# Altium PCB MCH_MAIN.PCBDOC (part 1 of 5)
Units mil, origin at the board's own origin, x right, y up, seen from the top; angles counter-clockwise.
Board outline 7194.88 x 2984.25 mil, 8 copper layers (Top Layer, MidLayer1, MidLayer2, GND, Power, MidLayer3, MidLayer4, Bottom Layer); 584 components, 952 nets, 3896 pads, 365 vias.
Unrouted connection lines stored in the file: 2112.
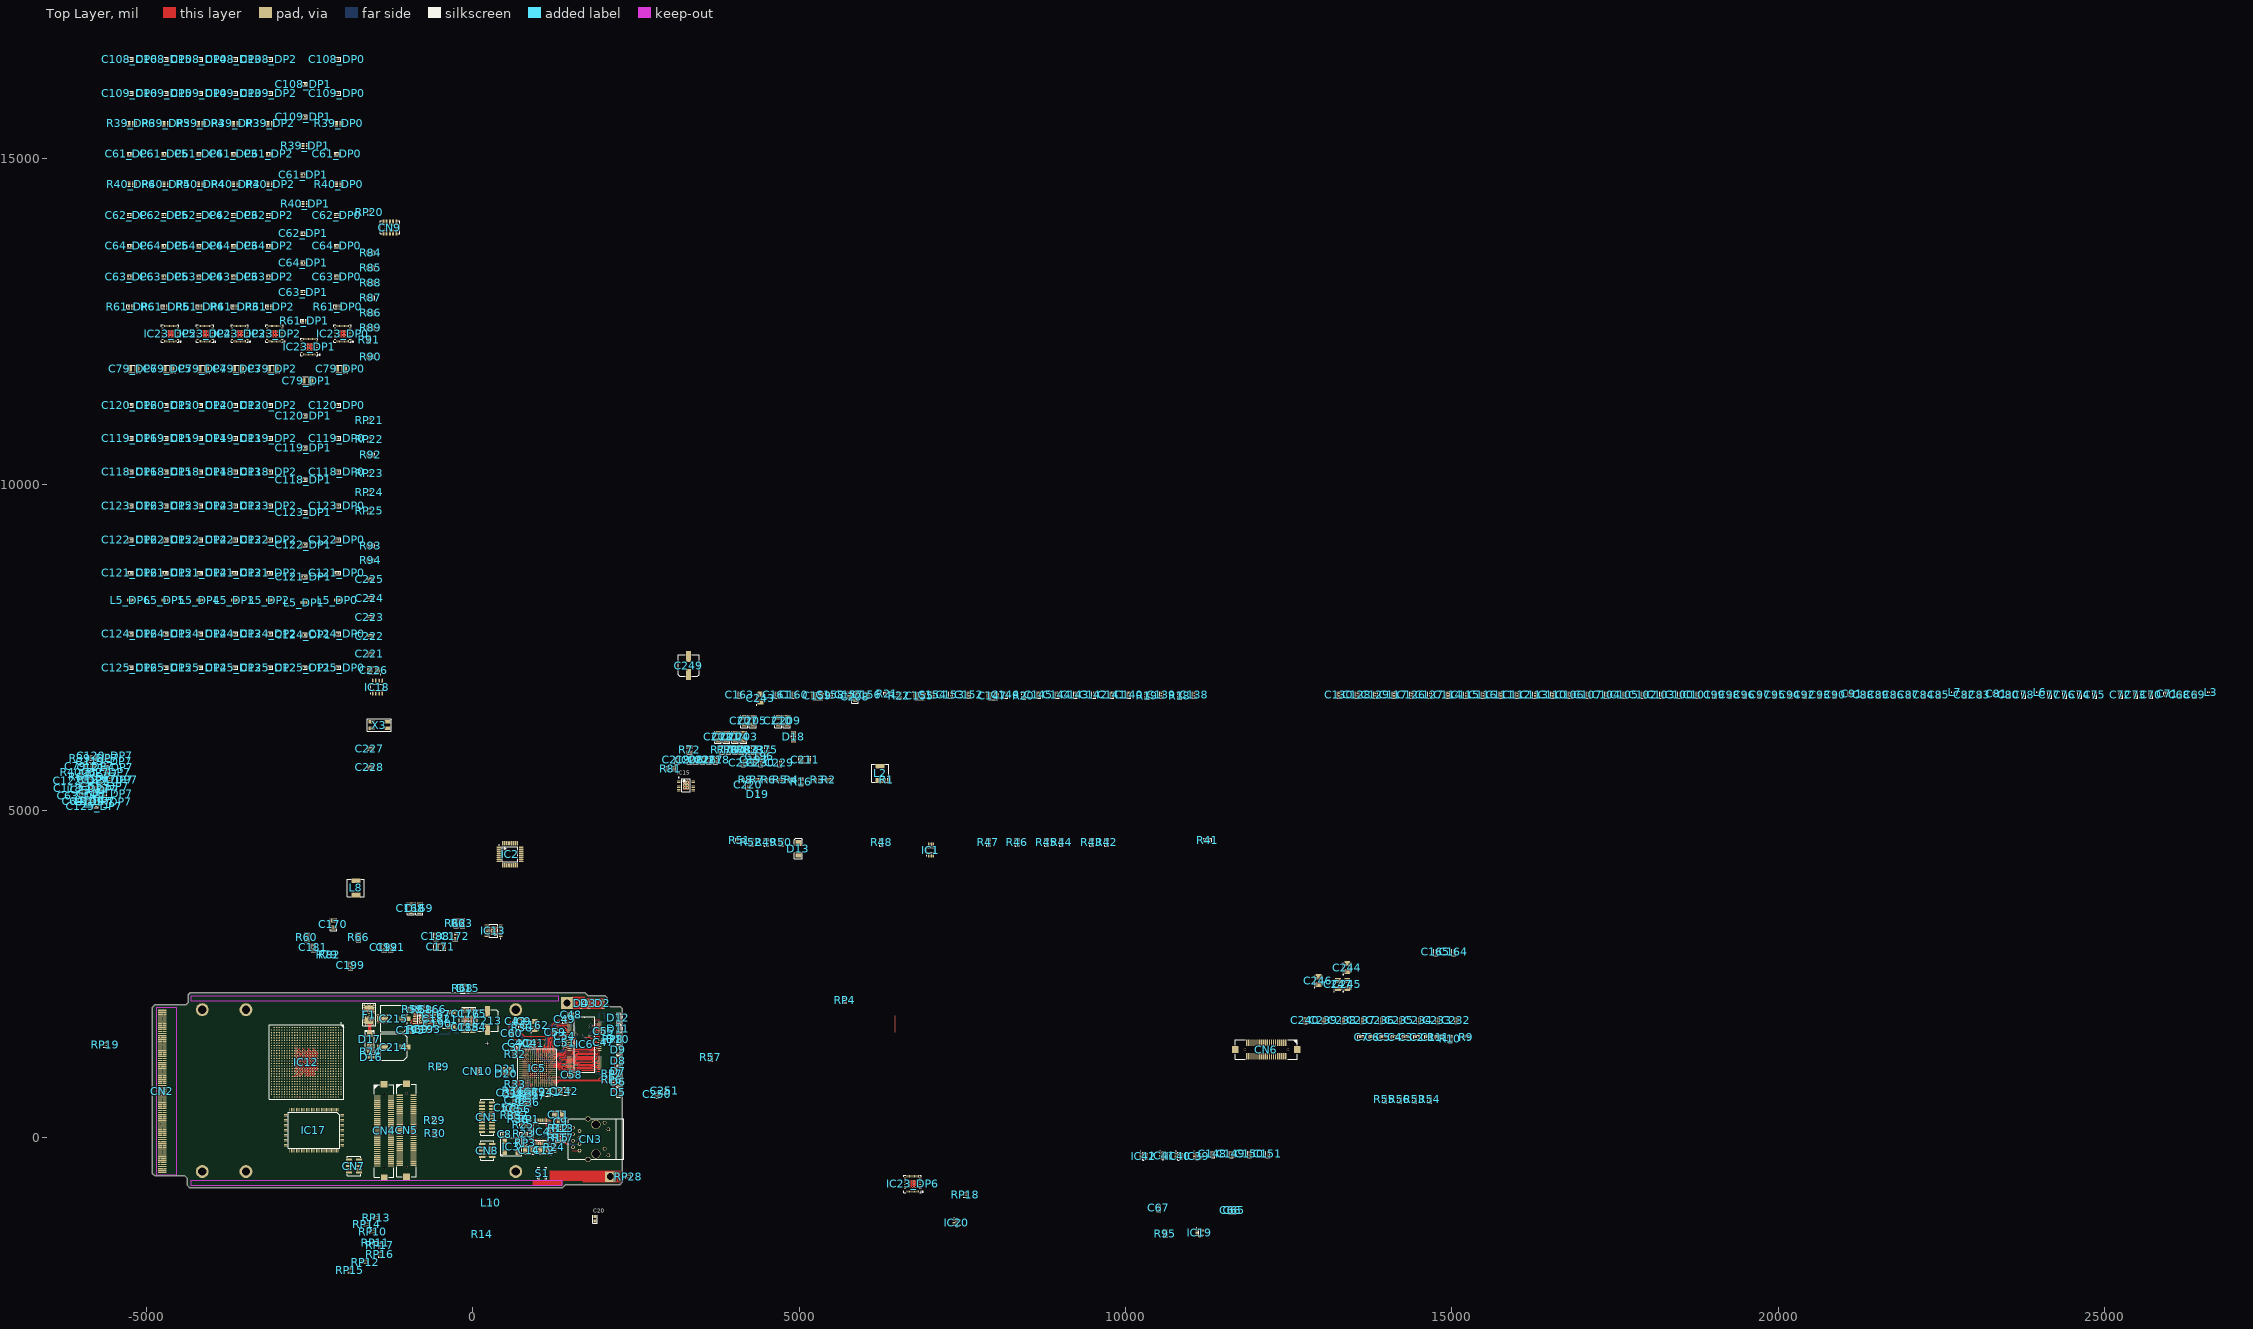
[diagram p0: Top Layer view]
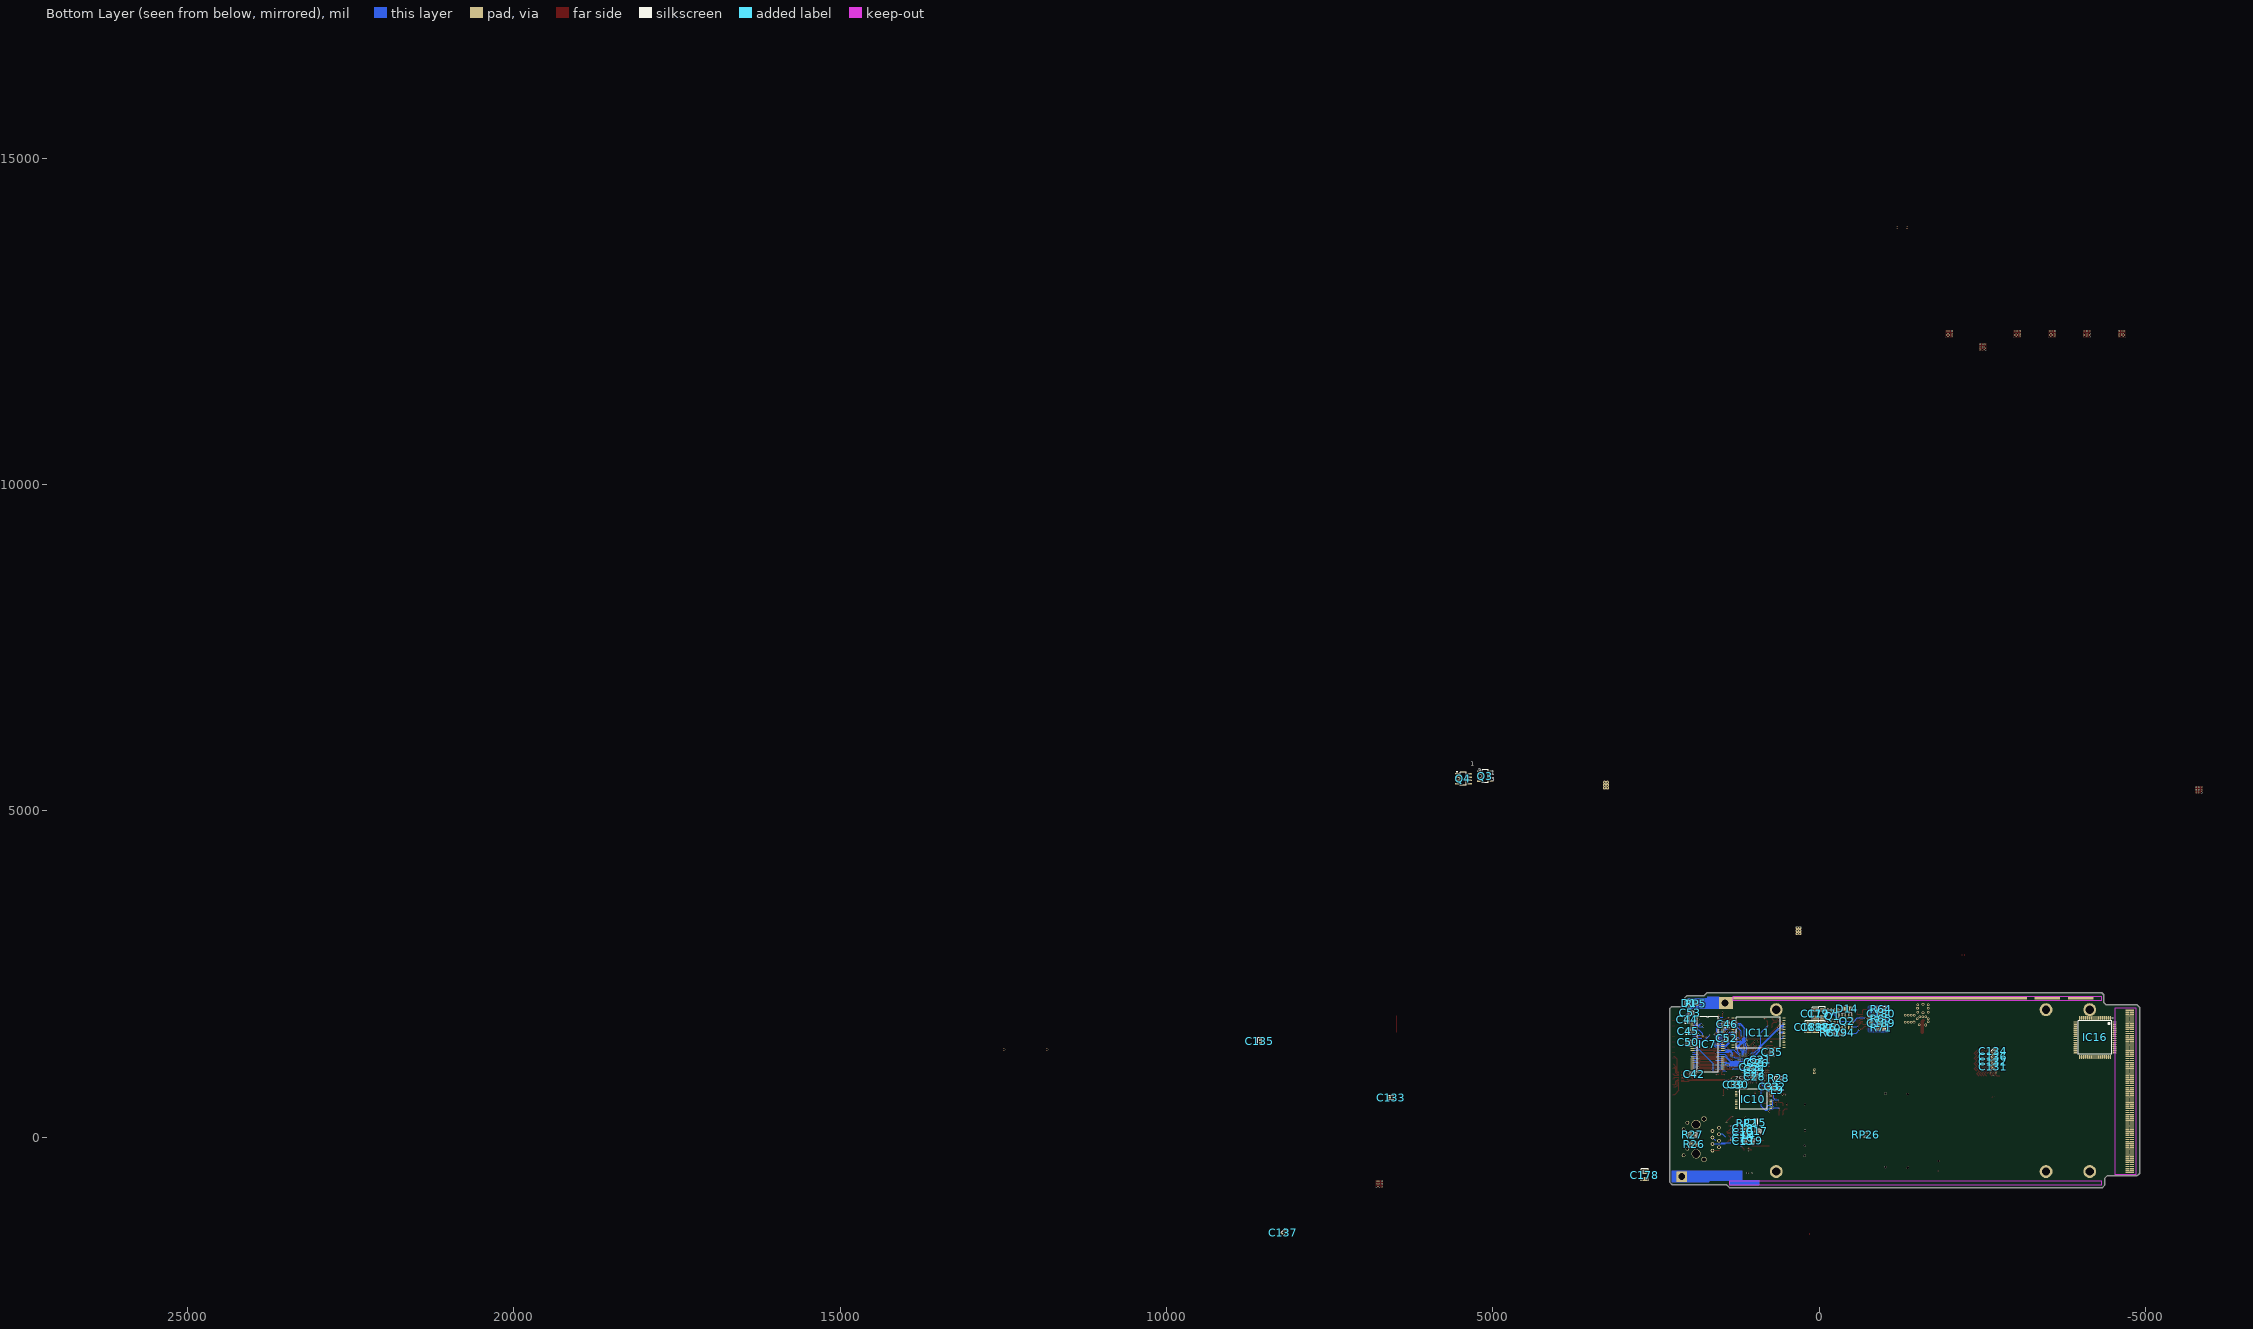
[diagram p1: Bottom Layer view, seen from below]
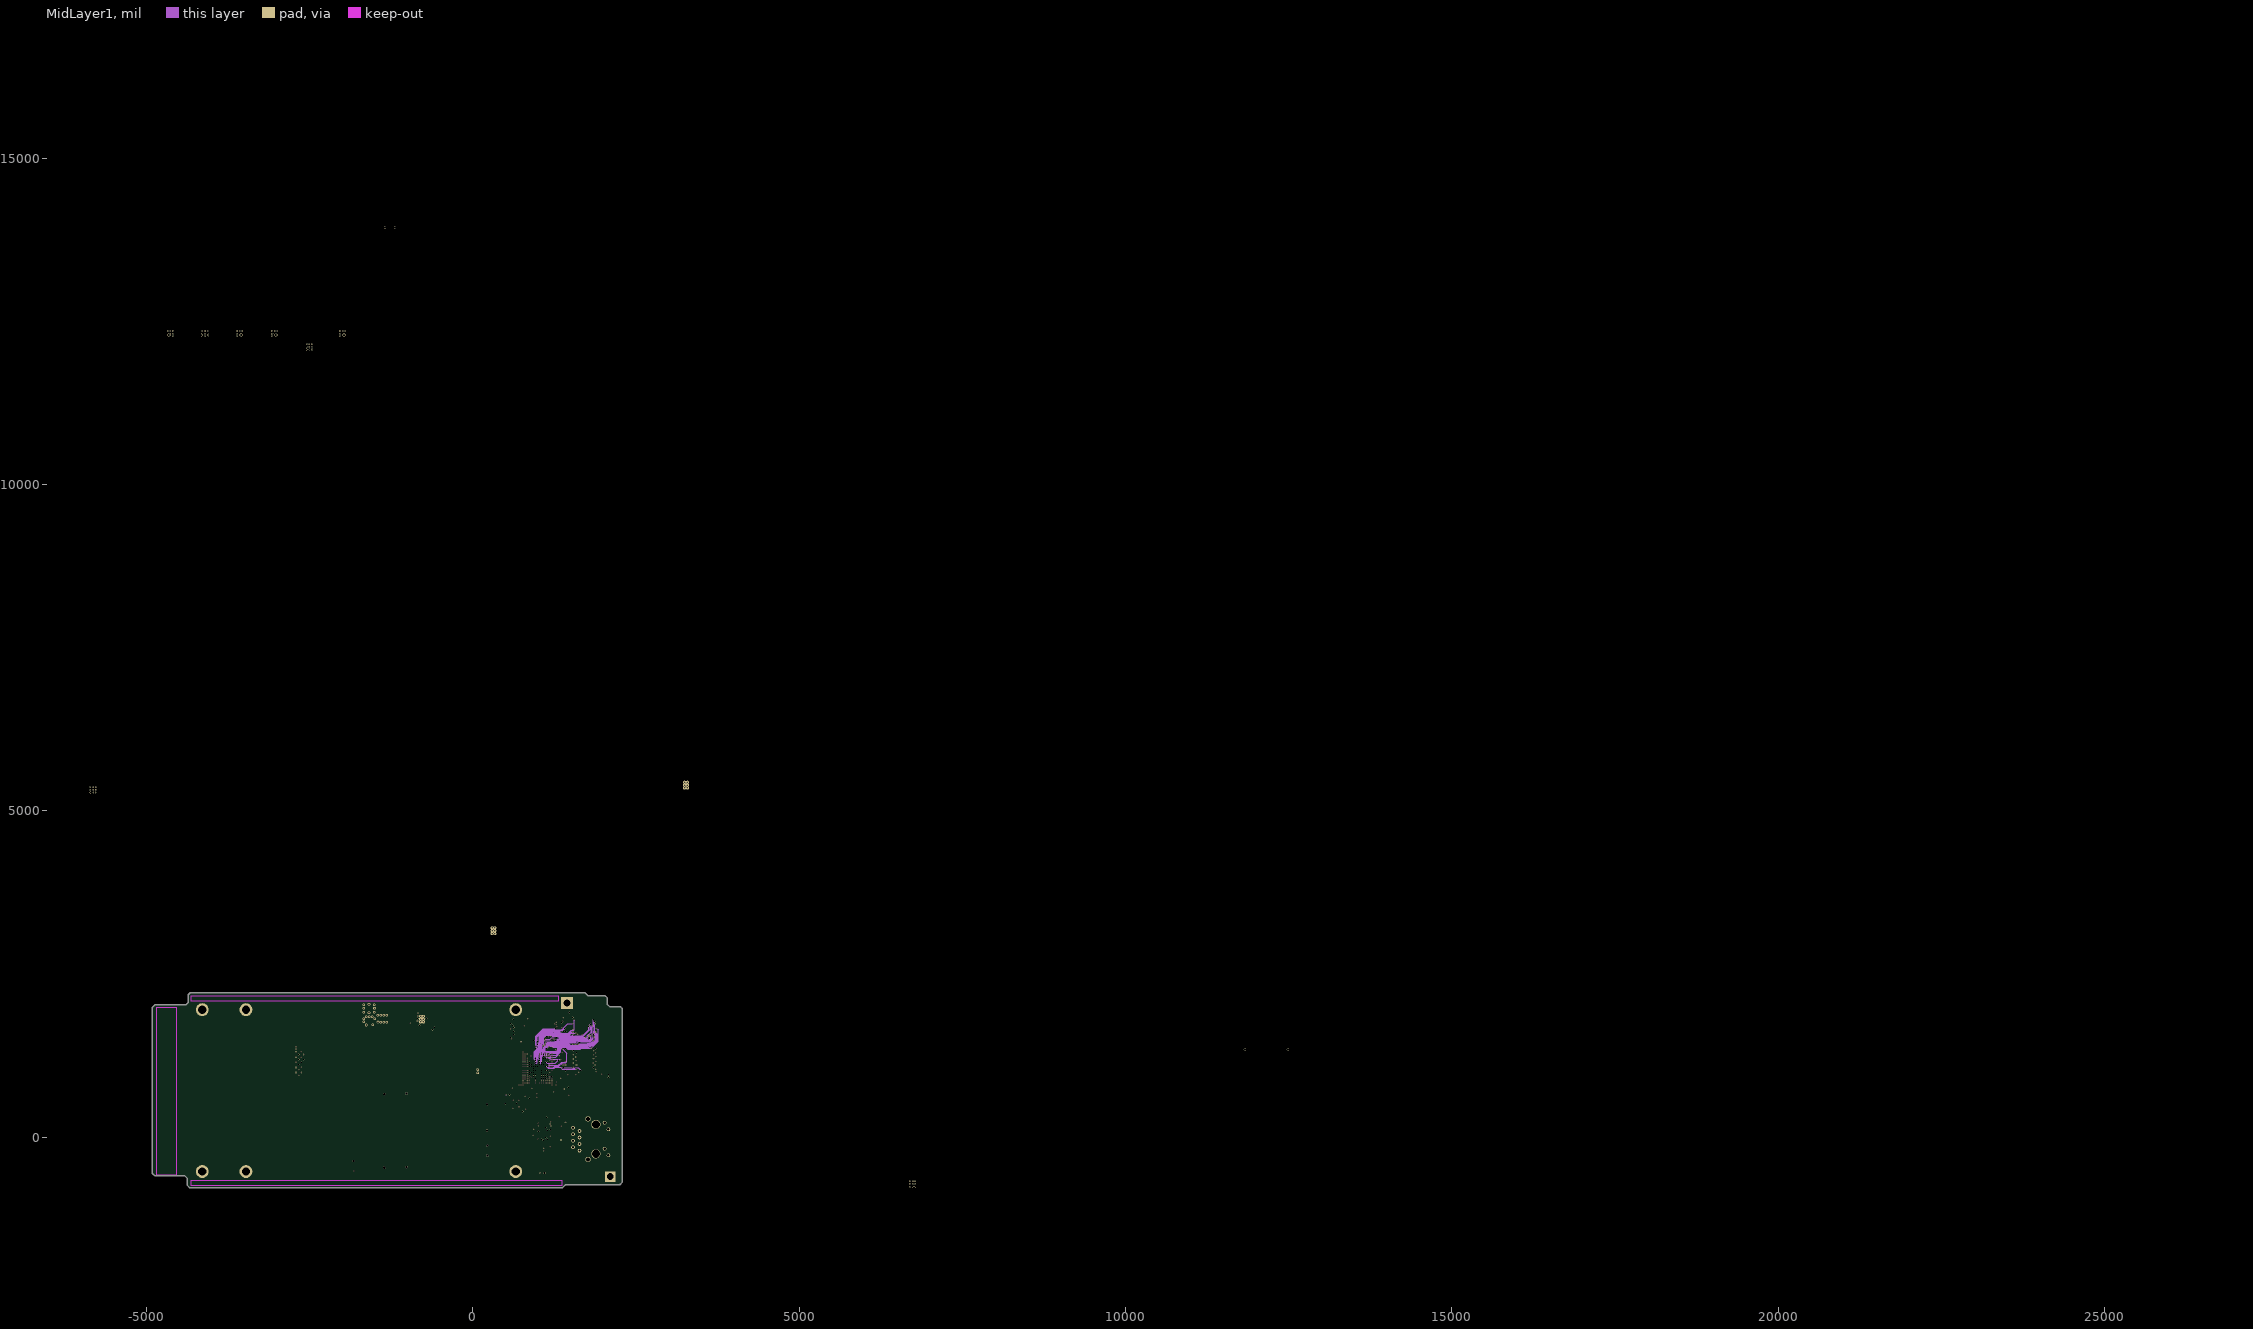
[diagram p2: MidLayer1]
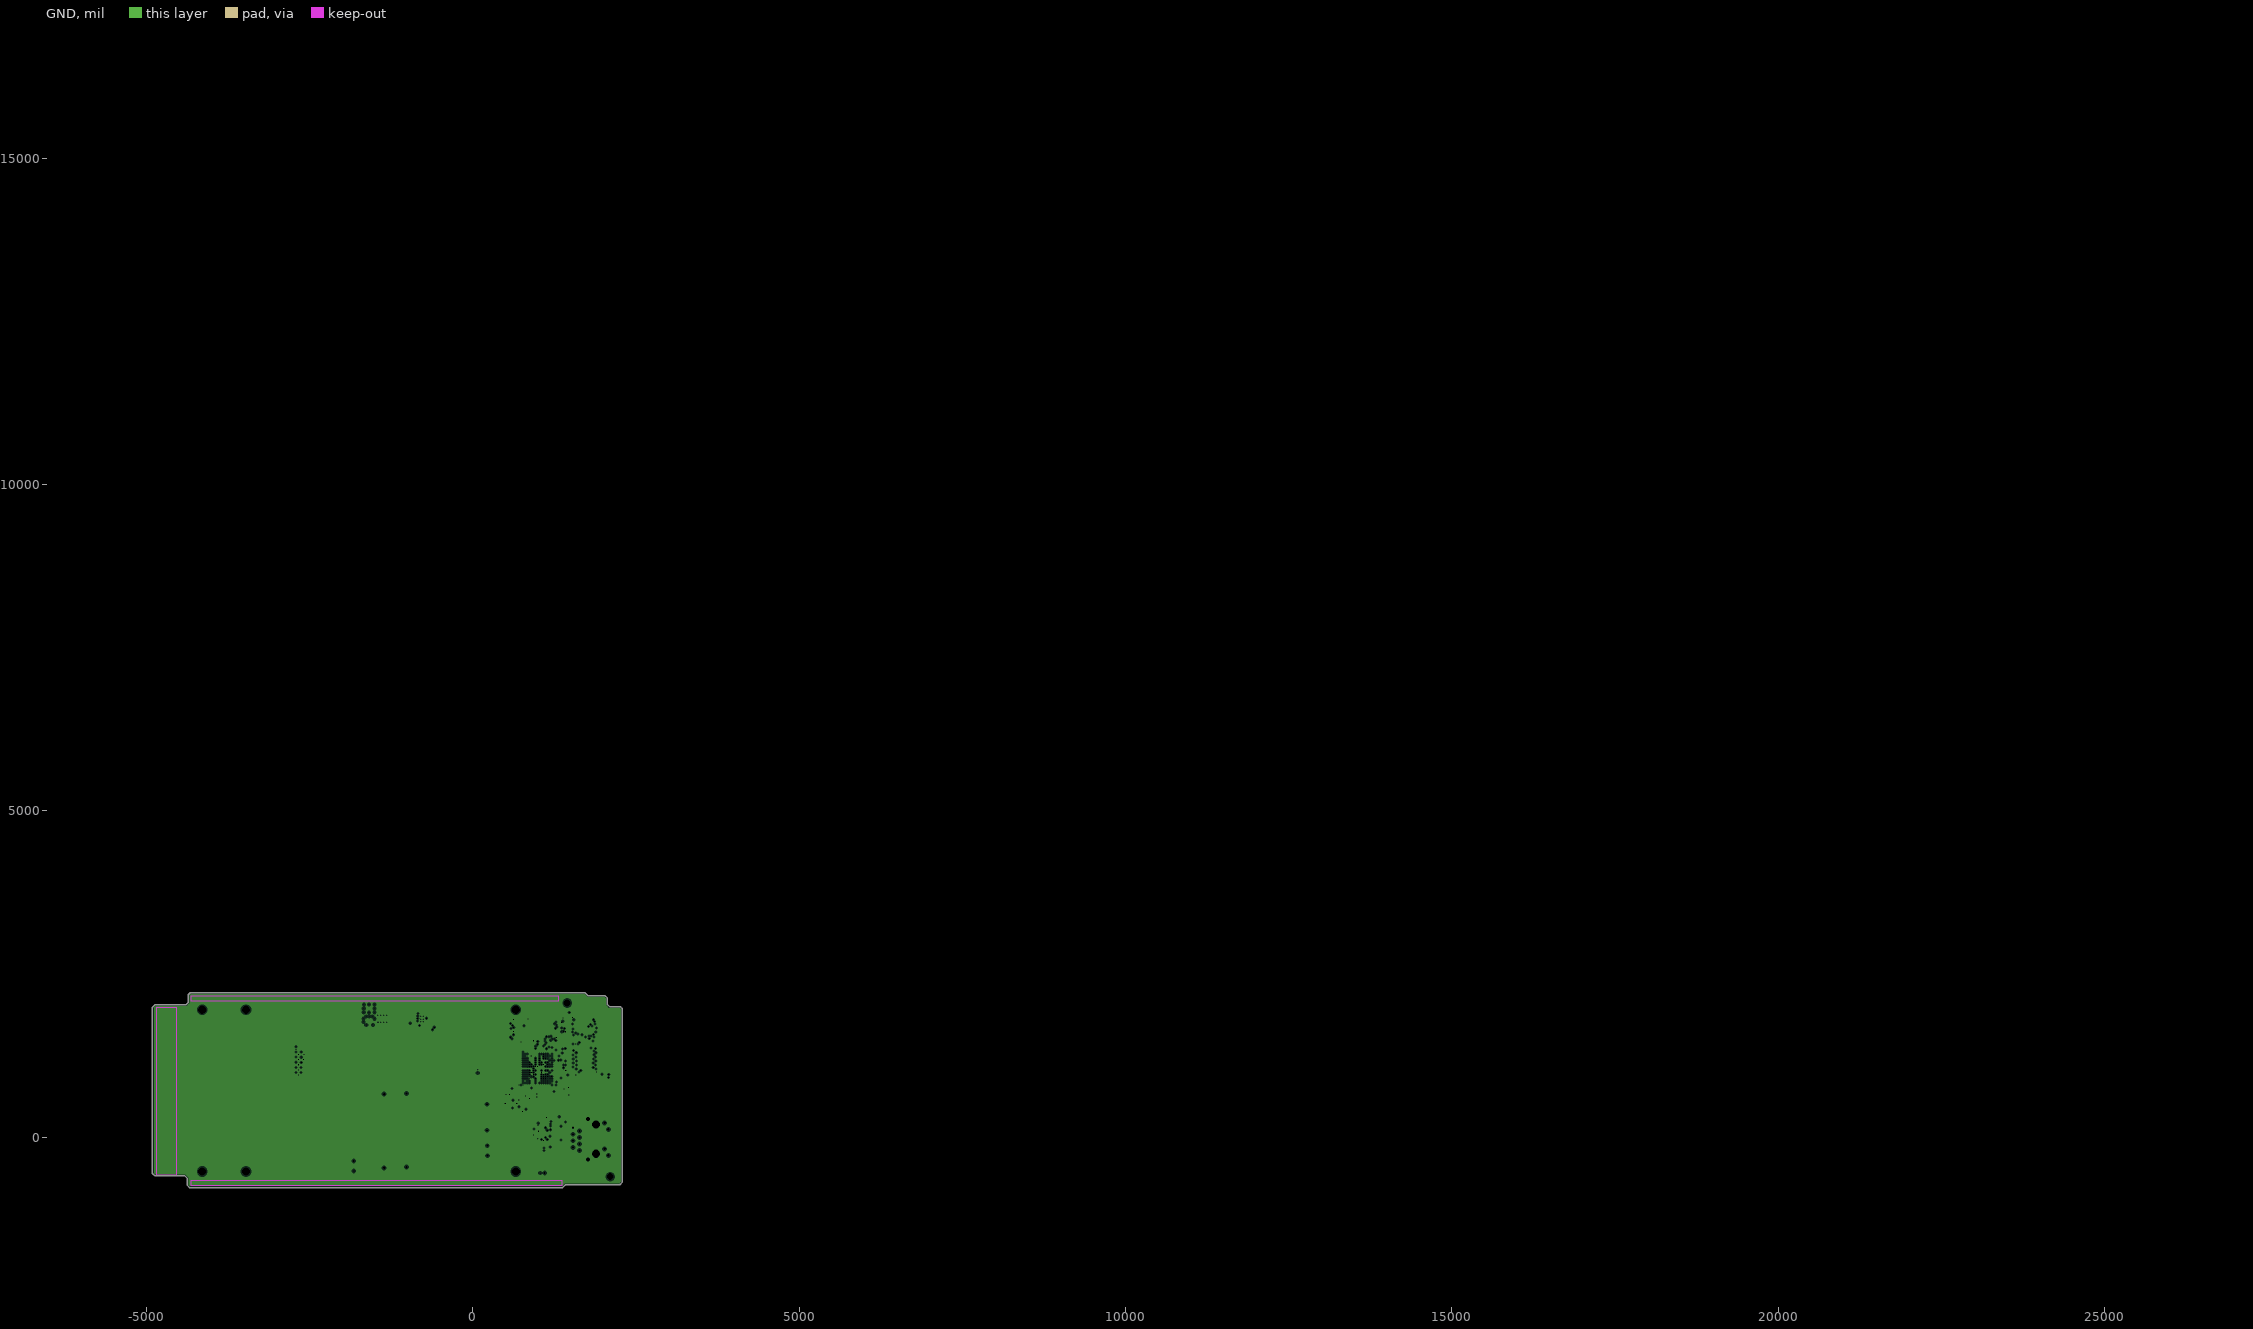
[diagram p3: GND, clearances drawn from the general rule]
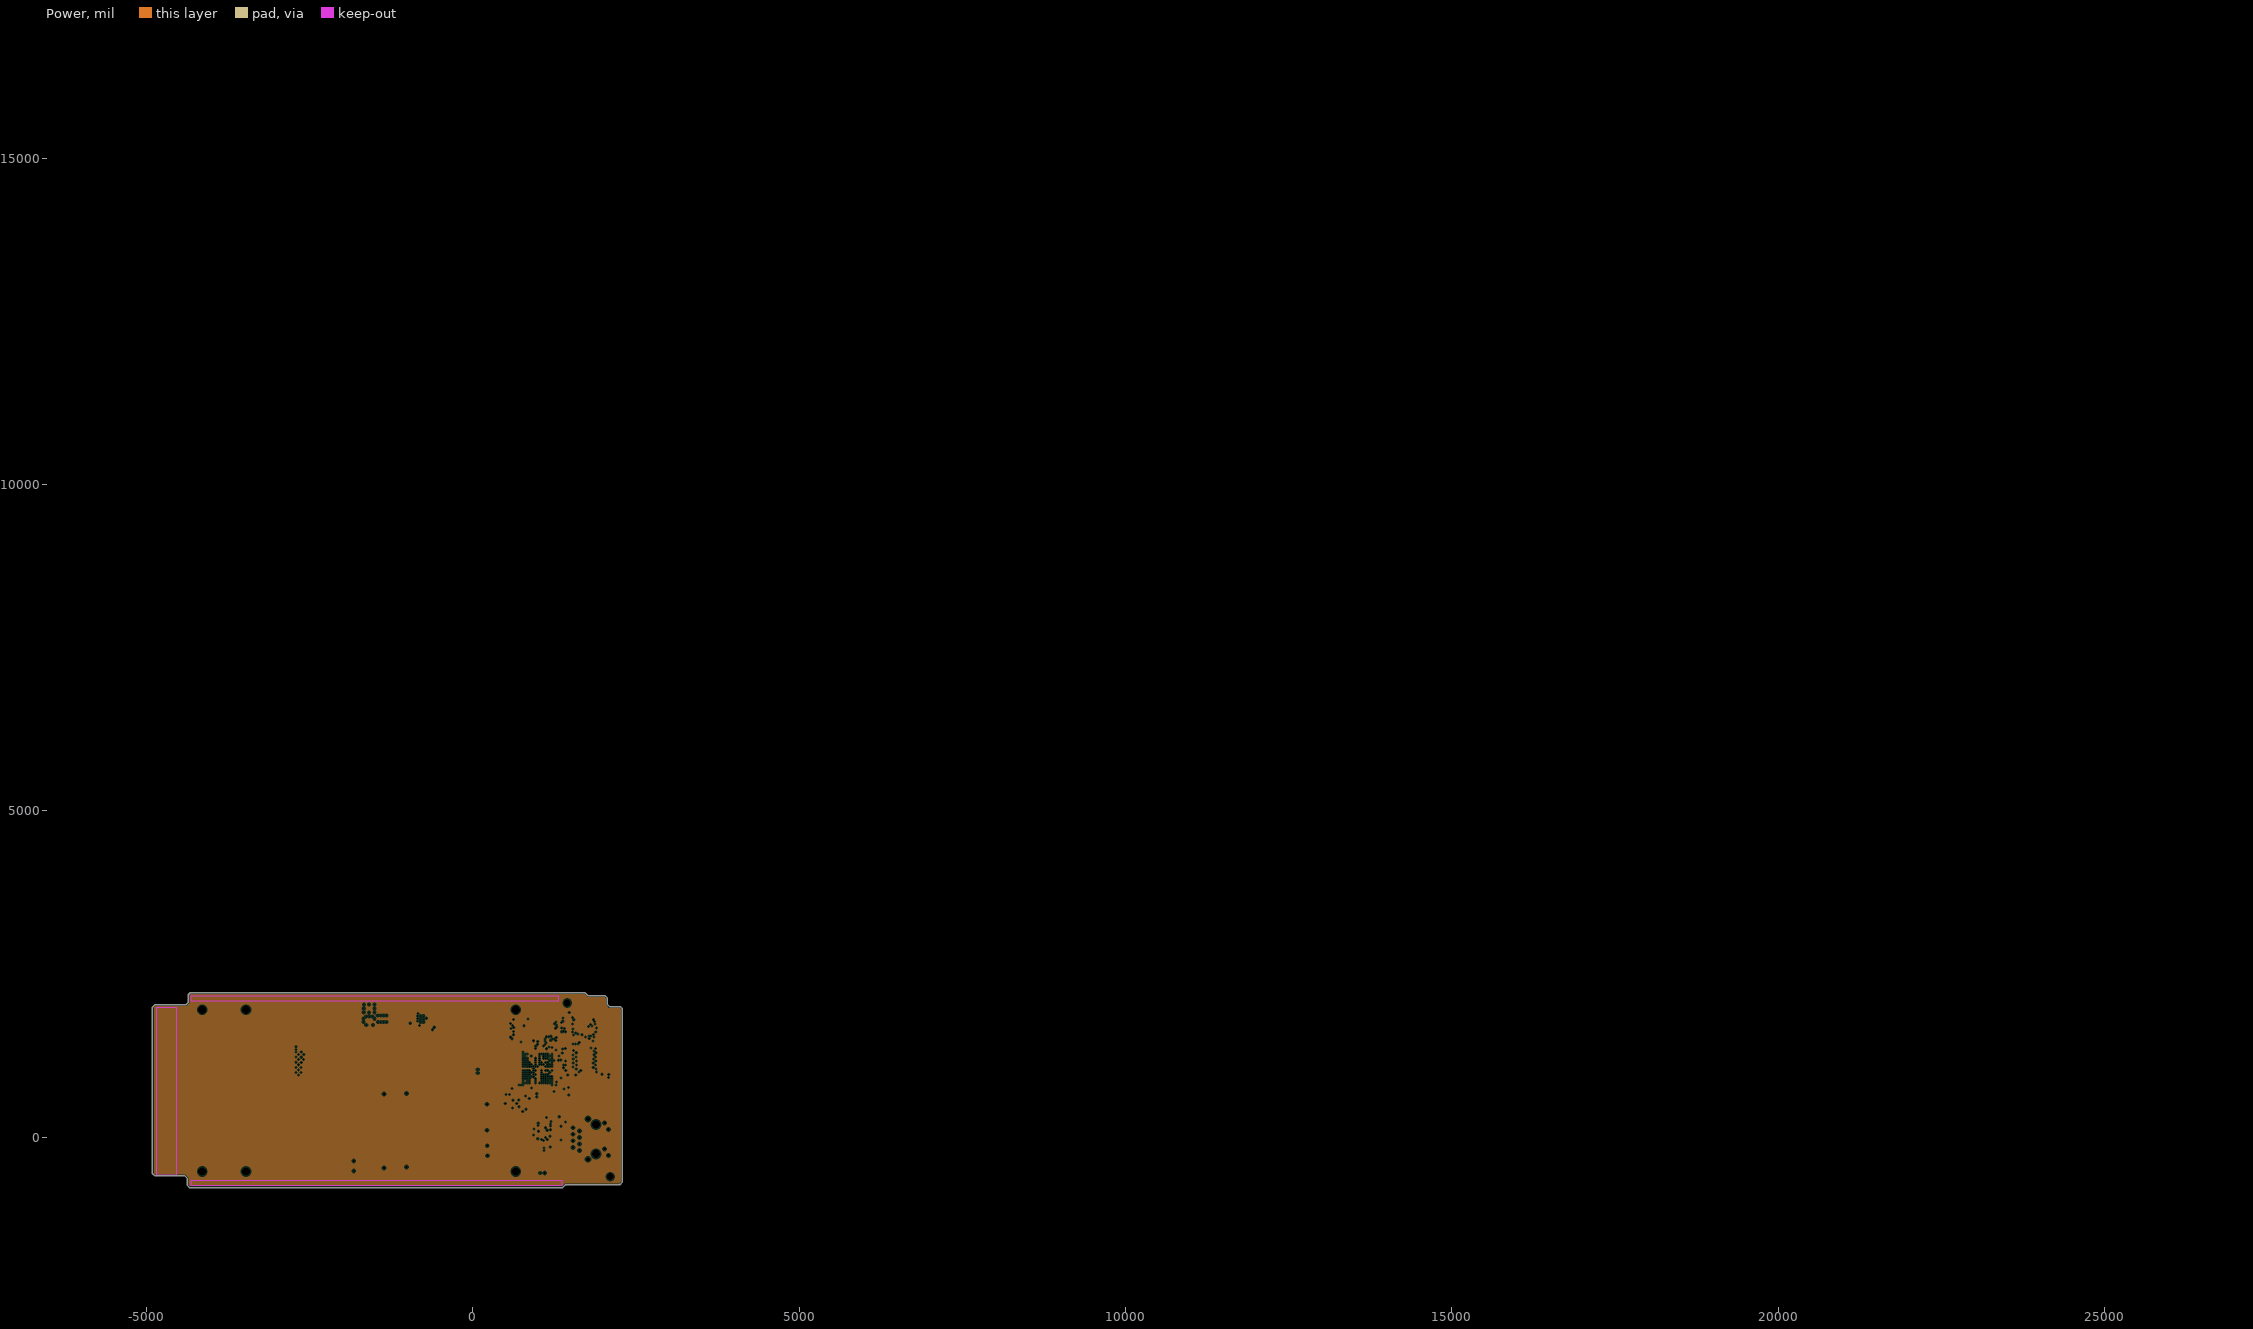
[diagram p4: Power, clearances drawn from the general rule]

## Layer stack, top to bottom
Top Layer: signal copper 1.4
Dielectric: core 12.6, FR-4, Dk 4.8
MidLayer1: signal copper 1.4
Dielectric: prepreg 12.6, FR-4, Dk 4.8
MidLayer2: signal copper 1.4
Dielectric: core 12.6, FR-4, Dk 4.8
GND: plane copper 1.4, net GND
Dielectric: prepreg 12.6, FR-4, Dk 4.8
Power: plane copper 1.4
Dielectric: core 12.6, FR-4, Dk 4.8
MidLayer3: signal copper 1.4
Dielectric: prepreg 12.6, FR-4, Dk 4.8
MidLayer4: signal copper 1.4
Dielectric: core 12.6, FR-4, Dk 4.8
Bottom Layer: signal copper 1.4

## Board outline
-4906.88,1992.65 -4869.47,2030.06 -4404.91,2030.06 -4395.06,2030.06 -4359.63,2065.49 -4359.63,2183.6 -4328.14,2215.09 1721.08,2215.09 1766.35,2169.82 2026.2,2169.82 2063.6,2132.42 2063.6,2033.99 2095.09,2002.5 2260.45,2002.5 2288.01,1974.94 2288.01,-690.42 2252.57,-725.85 1419.9,-725.85 1376.59,-769.16 -4339.95,-769.16 -4377.35,-731.76 -4377.35,-625.46 -4410.81,-591.99 -4869.47,-591.99 -4895.06,-566.4 -4906.88,-554.59 -4906.88,1992.65

## Design rules (kind name [scope] priority, off if disabled: settings)
Clearance Clearance_fine_bga [WithinRoom('CPU') vs WithinRoom('CPU')] p1: gap=4
Clearance [All] p2: gap=5
HoleSize [All] p1: absolutevalues=TRUE maxlimit=118.11 minlimit=1 maxpercent=80.000 minpercent=20.000
PlaneClearance [All] p1: clearance=20
PlaneConnect [All] p1: planeconnectstyle=Relief reliefexpansion=20 reliefentries=4 reliefconductorwidth=10 reliefairgap=10
PolygonConnect [All] p1: connectstyle=Relief reliefconductorwidth=10 reliefentries=4 polygonreliefangle="90 Angle"
RoomDefinition PSU_3V3 [InComponentClass('PSU_3V3')] p1: confinementstyle=ConfineIn formatcopy=TRUE lockcomponents=FALSE outline -991.14,571.85 1008.86,571.85 1008.86,1571.85 -991.14,1571.85
RoomDefinition PSU_2V5 [InComponentClass('PSU_2V5')] p2: confinementstyle=ConfineIn formatcopy=TRUE lockcomponents=FALSE outline 400.59,2018.7 -1024.61,2018.7 -1024.61,1560.04 400.59,1560.04
RoomDefinition U_MB_CPU_memory [InComponentClass('U_MB_CPU_memory')] p3: confinementstyle=ConfineIn formatcopy=TRUE lockcomponents=FALSE outline -6361.6,-2299 -4361.6,-2299 -4361.6,-1299 -6361.6,-1299
RoomDefinition CPU [InComponentClass('CPU')] p4: confinementstyle=ConfineIn formatcopy=TRUE lockcomponents=FALSE outline -6361.6,-2299 -4361.6,-2299 -4361.6,-1299 -6361.6,-1299
RoomDefinition DP0 [InComponentClass('DP0')] p5: confinementstyle=ConfineIn formatcopy=TRUE lockcomponents=FALSE outline -1816.13,7158.07 -1816.13,16959.23 -2247.23,16959.23 -2247.23,7158.07
RoomDefinition DP1 [InComponentClass('DP1')] p6: confinementstyle=ConfineIn formatcopy=TRUE lockcomponents=FALSE outline -2327.94,7158.07 -2327.94,16559.62 -2759.04,16559.62 -2759.04,7158.07
RoomDefinition DP2 [InComponentClass('DP2')] p7: confinementstyle=ConfineIn formatcopy=TRUE lockcomponents=FALSE outline -2859.44,7158.07 -2859.44,16959.23 -3292.51,16959.23 -3292.51,7158.07
RoomDefinition DP3 [InComponentClass('DP3')] p8: confinementstyle=ConfineIn formatcopy=TRUE lockcomponents=FALSE outline -3392.9,7158.07 -3392.9,16959.23 -3824,16959.23 -3824,7158.07
RoomDefinition DP4 [InComponentClass('DP4')] p9: confinementstyle=ConfineIn formatcopy=TRUE lockcomponents=FALSE outline -3924.4,7158.07 -3924.4,16959.23 -4355.5,16959.23 -4355.5,7158.07
RoomDefinition DP5 [InComponentClass('DP5')] p10: confinementstyle=ConfineIn formatcopy=TRUE lockcomponents=FALSE outline -4457.86,7158.07 -4457.86,16959.23 -4888.96,16959.23 -4888.96,7158.07
RoomDefinition DP6 [InComponentClass('DP6')] p11: confinementstyle=ConfineIn formatcopy=TRUE lockcomponents=FALSE outline -4989.36,7158.07 -4989.36,16959.23 -5420.46,16959.23 -5420.46,7158.07
RoomDefinition DP7 [InComponentClass('DP7')] p12: confinementstyle=ConfineIn formatcopy=TRUE lockcomponents=FALSE outline -5540.88,5175.8 -5540.88,5839.19 -5973.95,5839.19 -5973.95,5175.8
RoomDefinition FPGA [InComponentClass('FPGA')] p13: confinementstyle=ConfineIn formatcopy=TRUE lockcomponents=FALSE outline -3157.48,625.98 -1984.25,625.98 -1984.25,1820.87 -3157.48,1820.87
RoomDefinition LETH [InComponentClass('LETH')] p14: confinementstyle=ConfineIn formatcopy=TRUE lockcomponents=FALSE outline 684.06,-344.49 1414.37,-344.49 1414.37,257.87 684.06,257.87
RoomDefinition MB_main [InComponentClass('MB_main')] p15: confinementstyle=ConfineIn formatcopy=TRUE lockcomponents=FALSE outline 2333.26,-411.21 3075.39,-411.21 3075.39,-149.4 2333.26,-149.4
RoomDefinition SENS [InComponentClass('SENS')] p16: confinementstyle=ConfineIn formatcopy=TRUE lockcomponents=FALSE outline 10199.92,-360.96 12363.3,-360.96 12363.3,-99.15 10199.92,-99.15
RoomDefinition U_MB_clocking [InComponentClass('U_MB_clocking')] p17: confinementstyle=ConfineIn formatcopy=TRUE lockcomponents=FALSE outline 2333.26,5049.41 6408.06,5049.41 6408.06,5616.34 2333.26,5616.34
RoomDefinition U_MB_fpga_power [InComponentClass('U_MB_fpga_power')] p18: confinementstyle=ConfineIn formatcopy=TRUE lockcomponents=FALSE outline 2333.26,6606.49 27392.27,6606.49 27392.27,6937.2 2333.26,6937.2
RoomDefinition U_MB_ZBT_memory [InComponentClass('U_MB_ZBT_memory')] p19: confinementstyle=ConfineIn formatcopy=TRUE lockcomponents=FALSE outline -2931.1,-244.09 -1937.01,-244.09 -1937.01,490.16 -2931.1,490.16
RoomDefinition WD [InComponentClass('WD')] p20: confinementstyle=ConfineIn formatcopy=TRUE lockcomponents=FALSE outline -950.98,5627.2 -950.98,14377.19 -1730.5,14377.19 -1730.5,5627.2
RoutingVias [All] p1: holewidth=8 width=18 viastyle="Through Hole" minholewidth=8 minwidth=18 maxholewidth=40 maxwidth=100
SolderMaskExpansion [All] p1: expansion=4
TestPointUsage [All] p1: valid=0 allowmultiple=FALSE
Testpoint [All] p1: side=15 testpointundercomponent=TRUE minsize=40 maxsize=100 preferedsize=60 minholesize=0 maxholesize=40 preferedholesize=32 testpointgrid=1 style=1023 order=0-112345678
Width [All] p1: maxlimit=100 minlimit=5 preferedwidth=5
16 further rules are at their usual default settings.

## Classes and differential pairs
component class PSU_3V3: C196 C197 C201 C202 C203 C204 C205 C206 C207 C208 C209 C210 C211 C212 C216 C217 C218 C219 C220 C249 D18 D19 IC15 L2 Q3 Q4 R72 R73 R75 R76 R77 R78 R80 R81 R83
component class PSU_2V5: C166 C167 C175 C176 C177 C178 C179 C180 C182 C183 C184 C185 C186 C187 C189 C190 C193 C194 C195 C213 D14 D15 IC14 L1 Q1 Q2 R58 R59 R64 R65 R67 R68 R69 R70 R71
net class ZBT_IOP[1..4]: ZBT_IOP1 ZBT_IOP2 ZBT_IOP3 ZBT_IOP4
net class ZBT_IO[0..31]: ZBT_IO0 ZBT_IO1 ZBT_IO2 ZBT_IO3 ZBT_IO4 ZBT_IO5 ZBT_IO6 ZBT_IO7 ZBT_IO8 ZBT_IO9 ZBT_IO10 ZBT_IO11 ZBT_IO12 ZBT_IO13 ZBT_IO14 ZBT_IO15 ZBT_IO16 ZBT_IO17 ZBT_IO18 ZBT_IO19 ZBT_IO20 ZBT_IO21 ZBT_IO22 ZBT_IO23 ZBT_IO24 ZBT_IO25 ZBT_IO26 ZBT_IO27 ZBT_IO28 ZBT_IO29 ZBT_IO30 ZBT_IO31
net class ZBT_BW[1..4]: ZBT_BW1 ZBT_BW2 ZBT_BW3 ZBT_BW4
net class ZBT_A[0..16]: ZBT_A0 ZBT_A1 ZBT_A2 ZBT_A3 ZBT_A4 ZBT_A5 ZBT_A6 ZBT_A7 ZBT_A8 ZBT_A9 ZBT_A10 ZBT_A11 ZBT_A12 ZBT_A13 ZBT_A14 ZBT_A15 ZBT_A16
net class UP1_TD[0..9]: UP1_TD0 UP1_TD1 UP1_TD2 UP1_TD3 UP1_TD4 UP1_TD5 UP1_TD6 UP1_TD7 UP1_TD8 UP1_TD9
net class UP1_RD[0..9]: UP1_RD0 UP1_RD1 UP1_RD2 UP1_RD3 UP1_RD4 UP1_RD5 UP1_RD6 UP1_RD7 UP1_RD8 UP1_RD9
net class UP0_TD[0..9]: UP0_TD0 UP0_TD1 UP0_TD2 UP0_TD3 UP0_TD4 UP0_TD5 UP0_TD6 UP0_TD7 UP0_TD8 UP0_TD9
net class UP0_RD[0..9]: UP0_RD0 UP0_RD1 UP0_RD2 UP0_RD3 UP0_RD4 UP0_RD5 UP0_RD6 UP0_RD7 UP0_RD8 UP0_RD9
net class SMI_TX[0..7]: SMI_TX0 SMI_TX1 SMI_TX2 SMI_TX3 SMI_TX4 SMI_TX5 SMI_TX6 SMI_TX7
net class SMI_RX[0..7]: SMI_RX0 SMI_RX1 SMI_RX2 SMI_RX3 SMI_RX4 SMI_RX5 SMI_RX6 SMI_RX7
net class RBCLK_DP[0..7]: RBCLK_DP0 RBCLK_DP1 RBCLK_DP2 RBCLK_DP3 RBCLK_DP4 RBCLK_DP5 RBCLK_DP6 RBCLK_DP7
net class PE[0..19]: PE0 PE1 PE2 PE3 PE4 PE5 PE6 PE7 PE8 PE9 PE10 PE11 PE12 PE13 PE14 PE15 PE16 PE17 PE18 PE19
net class PC[0..19]: PC0 PC1 PC2 PC3 PC4 PC5 PC6 PC7 PC8 PC9 PC10 PC11 PC12 PC13 PC14 PC15 PC16 PC17 PC18 PC19
net class PB[16..31]: PB16 PB17 PB18 PB19 PB20 PB21 PB22 PB23 PB24 PB25 PB26 PB27 PB28 PB29 PB30 PB31
net class GPIO[0..7]: GPIO0 GPIO1 GPIO2 GPIO3 GPIO4 GPIO5 GPIO6 GPIO7
net class DP_SYNCEN[0..7]: DP_SYNCEN0 DP_SYNCEN1 DP_SYNCEN2 DP_SYNCEN3 DP_SYNCEN4 DP_SYNCEN5 DP_SYNCEN6 DP_SYNCEN7
net class DP_SYNC_PASS[0..7]: DP_SYNC_PASS0 DP_SYNC_PASS1 DP_SYNC_PASS2 DP_SYNC_PASS3 DP_SYNC_PASS4 DP_SYNC_PASS5 DP_SYNC_PASS6 DP_SYNC_PASS7
net class DP_PRBSEN[0..7]: DP_PRBSEN0 DP_PRBSEN1 DP_PRBSEN2 DP_PRBSEN3 DP_PRBSEN4 DP_PRBSEN5 DP_PRBSEN6 DP_PRBSEN7
net class DP_LOOPEN[0..7]: DP_LOOPEN0 DP_LOOPEN1 DP_LOOPEN2 DP_LOOPEN3 DP_LOOPEN4 DP_LOOPEN5 DP_LOOPEN6 DP_LOOPEN7
net class DP_ENABLE[0..7]: DP_ENABLE0 DP_ENABLE1 DP_ENABLE2 DP_ENABLE3 DP_ENABLE4 DP_ENABLE5 DP_ENABLE6 DP_ENABLE7
net class DP7_TD[0..9]: DP7_TD0 DP7_TD1 DP7_TD2 DP7_TD3 DP7_TD4 DP7_TD5 DP7_TD6 DP7_TD7 DP7_TD8 DP7_TD9
net class DP7_RD[0..9]: DP7_RD0 DP7_RD1 DP7_RD2 DP7_RD3 DP7_RD4 DP7_RD5 DP7_RD6 DP7_RD7 DP7_RD8 DP7_RD9
net class DP6_TD[0..9]: DP6_TD0 DP6_TD1 DP6_TD2 DP6_TD3 DP6_TD4 DP6_TD5 DP6_TD6 DP6_TD7 DP6_TD8 DP6_TD9
net class DP6_RD[0..9]: DP6_RD0 DP6_RD1 DP6_RD2 DP6_RD3 DP6_RD4 DP6_RD5 DP6_RD6 DP6_RD7 DP6_RD8 DP6_RD9
net class DP5_TD[0..9]: DP5_TD0 DP5_TD1 DP5_TD2 DP5_TD3 DP5_TD4 DP5_TD5 DP5_TD6 DP5_TD7 DP5_TD8 DP5_TD9
net class DP5_RD[0..9]: DP5_RD0 DP5_RD1 DP5_RD2 DP5_RD3 DP5_RD4 DP5_RD5 DP5_RD6 DP5_RD7 DP5_RD8 DP5_RD9
net class DP4_TD[0..9]: DP4_TD0 DP4_TD1 DP4_TD2 DP4_TD3 DP4_TD4 DP4_TD5 DP4_TD6 DP4_TD7 DP4_TD8 DP4_TD9
net class DP4_RD[0..9]: DP4_RD0 DP4_RD1 DP4_RD2 DP4_RD3 DP4_RD4 DP4_RD5 DP4_RD6 DP4_RD7 DP4_RD8 DP4_RD9
net class DP3_TD[0..9]: DP3_TD0 DP3_TD1 DP3_TD2 DP3_TD3 DP3_TD4 DP3_TD5 DP3_TD6 DP3_TD7 DP3_TD8 DP3_TD9
net class DP3_RD[0..9]: DP3_RD0 DP3_RD1 DP3_RD2 DP3_RD3 DP3_RD4 DP3_RD5 DP3_RD6 DP3_RD7 DP3_RD8 DP3_RD9
net class DP2_TD[0..9]: DP2_TD0 DP2_TD1 DP2_TD2 DP2_TD3 DP2_TD4 DP2_TD5 DP2_TD6 DP2_TD7 DP2_TD8 DP2_TD9
net class DP2_RD[0..9]: DP2_RD0 DP2_RD1 DP2_RD2 DP2_RD3 DP2_RD4 DP2_RD5 DP2_RD6 DP2_RD7 DP2_RD8 DP2_RD9
net class DP1_TD[0..9]: DP1_TD0 DP1_TD1 DP1_TD2 DP1_TD3 DP1_TD4 DP1_TD5 DP1_TD6 DP1_TD7 DP1_TD8 DP1_TD9
net class DP1_RD[0..9]: DP1_RD0 DP1_RD1 DP1_RD2 DP1_RD3 DP1_RD4 DP1_RD5 DP1_RD6 DP1_RD7 DP1_RD8 DP1_RD9
net class DP0_TD[0..9]: DP0_TD0 DP0_TD1 DP0_TD2 DP0_TD3 DP0_TD4 DP0_TD5 DP0_TD6 DP0_TD7 DP0_TD8 DP0_TD9
net class DP0_RD[0..9]: DP0_RD0 DP0_RD1 DP0_RD2 DP0_RD3 DP0_RD4 DP0_RD5 DP0_RD6 DP0_RD7 DP0_RD8 DP0_RD9
net class D[0..31]: D0 D1 D2 D3 D4 D5 D6 D7 D8 D9 D10 D11 D12 D13 D14 D15 D16 D17 D18 D19 D20 D21 D22 D23 D24 D25 D26 D27 D28 D29 D30 D31
net class CPU_D[0..31]: CPU_D0 CPU_D1 CPU_D2 CPU_D3 CPU_D4 CPU_D5 CPU_D6 CPU_D7 CPU_D8 CPU_D9 CPU_D10 CPU_D11 CPU_D12 CPU_D13 CPU_D14 CPU_D15 CPU_D16 CPU_D17 CPU_D18 CPU_D19 CPU_D20 CPU_D21 CPU_D22 CPU_D23 CPU_D24 CPU_D25 CPU_D26 CPU_D27 CPU_D28 CPU_D29 CPU_D30 CPU_D31
net class CPU_A[0..22]: CPU_A0 CPU_A1 CPU_A2 CPU_A3 CPU_A4 CPU_A5 CPU_A6 CPU_A7 CPU_A8 CPU_A9 CPU_A10 CPU_A11 CPU_A12 CPU_A13 CPU_A14 CPU_A15 CPU_A16 CPU_A17 CPU_A18 CPU_A19 CPU_A20
net class CMI_PIO[0..3]: CMI_PIO0 CMI_PIO1 CMI_PIO2 CMI_PIO3
net class AUX[0..7]: AUX0 AUX1 AUX2 AUX3 AUX4 AUX5 AUX6 AUX7
net class A[0..22]: A0 A1 A2 A3 A4 A5 A6 A7 A8 A9 A10 A11 A12 A13 A14 A15 A16 A17 A18 A19 A20 A21 A22
channel class MB_downlink_phy: DP0 DP1 DP2 DP3 DP4 DP5 DP6 DP7
component class WD: C221 C222 C223 C224 C225 C226 C227 C228 CN9 IC16 IC18 R84 R85 R86 R87 R88 R89 R90 R91 R92 R93 R94 RP18 RP19 RP20 RP21 RP22 RP23 RP24 RP25 X3
component class U_MB_ZBT_memory: C229 C230 C231 C232 C233 C234 C235 C236 C237 C238 C239 C240 IC17
component class U_MB_fpga_power: C65 C66 C67 C68 C69 C70 C71 C72 C73 C74 C75 C76 C77 C78 C80 C81 C82 C83 C84 C85 C86 C87 C88 C89 C90 C91 C92 C93 C94 C95 C96 C97 C98 C99 C100 C101 C102 C103 C104 C105 C106 C107 C110 C111 C112 C113 C114 C115 C116 C117 C126 C127 C128 C129 C130 C131 C132 C133 C134 C135 C136 C137 C138 C139 C140 C141 C142 C143 C144 C145 C146 C147 C152 C153 C154 C155 C156 C157 C158 C159 C160 C161 C163 C164 C165 C243 C244 C245 C246 C247 L3 L6 L7 L10 R18 R19 R20 R21 R22
component class U_MB_CPU_memory: C42 C43 C44 C45 C46 C47 C48 C49 C50 C51 C52 C53 C54 C55 C56 C57 C58 C59 C60 IC6 IC7 IC8 IC9 IC10 IC11 R35 R36 R37 R38
component class U_MB_clocking: C1 C2 C3 C4 C5 C6 C7 IC1 IC2 R1 R2 R3 R4 R5 R6 R7 R8 R9 R10 R11 R16
component class SENS: C148 C151 C250 C251 IC39 IC40 IC41 IC42
component class MB_main: C149 C150 CN2 CN3 CN4 CN5 CN6 CN7 CN8 D1 D2 D3 D4 D5 D6 D7 D8 D9 D10 D11 D12 D13 IC19 IC20 R41 R42 R43 R44 R45 R46 R47 R48 R49 R50 R51 R52 R53 R54 R55 R56 R95 RP5 RP6 RP7 RP8 RP28 S1
component class LETH: C8 C9 C10 C11 C12 C13 C14 C15 C16 C17 C18 C19 C20 IC3 IC4 L4 R12 R13 R14 R15 R17 R23 R24 R25 R26 R27 RP1 RP2 RP3
component class FPGA: IC12 R57 RP4 RP9 RP10 RP11 RP12 RP13 RP14 RP15 RP16 RP17
component class DP7: C61_DP7 C62_DP7 C63_DP7 C64_DP7 C79_DP7 C108_DP7 C109_DP7 C118_DP7 C119_DP7 C120_DP7 C121_DP7 C122_DP7 C123_DP7 C124_DP7 C125_DP7 IC23_DP7 L5_DP7 R39_DP7 R40_DP7 R61_DP7
component class DP6: C61_DP6 C62_DP6 C63_DP6 C64_DP6 C79_DP6 C108_DP6 C109_DP6 C118_DP6 C119_DP6 C120_DP6 C121_DP6 C122_DP6 C123_DP6 C124_DP6 C125_DP6 IC23_DP6 L5_DP6 R39_DP6 R40_DP6 R61_DP6
component class DP5: C61_DP5 C62_DP5 C63_DP5 C64_DP5 C79_DP5 C108_DP5 C109_DP5 C118_DP5 C119_DP5 C120_DP5 C121_DP5 C122_DP5 C123_DP5 C124_DP5 C125_DP5 IC23_DP5 L5_DP5 R39_DP5 R40_DP5 R61_DP5
component class DP4: C61_DP4 C62_DP4 C63_DP4 C64_DP4 C79_DP4 C108_DP4 C109_DP4 C118_DP4 C119_DP4 C120_DP4 C121_DP4 C122_DP4 C123_DP4 C124_DP4 C125_DP4 IC23_DP4 L5_DP4 R39_DP4 R40_DP4 R61_DP4
component class DP3: C61_DP3 C62_DP3 C63_DP3 C64_DP3 C79_DP3 C108_DP3 C109_DP3 C118_DP3 C119_DP3 C120_DP3 C121_DP3 C122_DP3 C123_DP3 C124_DP3 C125_DP3 IC23_DP3 L5_DP3 R39_DP3 R40_DP3 R61_DP3
component class DP2: C61_DP2 C62_DP2 C63_DP2 C64_DP2 C79_DP2 C108_DP2 C109_DP2 C118_DP2 C119_DP2 C120_DP2 C121_DP2 C122_DP2 C123_DP2 C124_DP2 C125_DP2 IC23_DP2 L5_DP2 R39_DP2 R40_DP2 R61_DP2
component class DP1: C61_DP1 C62_DP1 C63_DP1 C64_DP1 C79_DP1 C108_DP1 C109_DP1 C118_DP1 C119_DP1 C120_DP1 C121_DP1 C122_DP1 C123_DP1 C124_DP1 C125_DP1 IC23_DP1 L5_DP1 R39_DP1 R40_DP1 R61_DP1
component class DP0: C61_DP0 C62_DP0 C63_DP0 C64_DP0 C79_DP0 C108_DP0 C109_DP0 C118_DP0 C119_DP0 C120_DP0 C121_DP0 C122_DP0 C123_DP0 C124_DP0 C125_DP0 IC23_DP0 L5_DP0 R39_DP0 R40_DP0 R61_DP0
component class CPU: C21 C22 C23 C24 C25 C26 C27 C28 C29 C30 C31 C32 C33 C34 C35 C36 C37 C38 C39 C40 C41 C162 C241 C242 C252 CN1 CN10 D20 D21 IC5 L9 R28 R29 R30 R31 R32 R33 R34 RP26 X1 X2

## Components (designator, comment, footprint, x,y, rotation, side; value= is the part's Value field where it differs from the comment)
C1 "Cap" CC1005-0402 14641.33,1534.65 r0 top
C2 "Cap" CC1005-0402 14472.04,1534.65 r0 top
C3 "Cap" CC1005-0402 14300.78,1534.65 r0 top
C4 "Cap" CC1005-0402 14131.49,1534.65 r0 top
C5 "Cap" CC1005-0402 13960.23,1534.65 r0 top
C6 "Cap" CC1005-0402 13790.94,1534.65 r0 top
C7 "Cap" CC1005-0402 13619.68,1534.65 r0 top
C8 "Cap" CC1005-0402 490,45 r0 top
C9 "Cap" CC1608-0603 1345,240 r180 top
C10 "Cap" CC1005-0402 1166.22,76.42 r0 bottom
C11 "Cap Pol1" TC3528-1411 1315,345 r0 top
C12 "Cap Pol1" TC3528-1411 1092.28,-201.57 r180 top
C13 "Cap" CC1005-0402 1166.22,-63.58 r0 bottom
C14 "Cap Pol1" TC3528-1411 867.28,-201.57 r0 top
C15 "Cap" CC1005-0402 971.22,220.73 r270 bottom
C16 "Cap" CC1005-0402 1166.22,-3.58 r0 bottom
C17 "Cap" CC1005-0402 947.28,93.43 r0 bottom
C18 "Cap" CC1005-0402 1166.22,136.42 r0 bottom
C19 "Cap" CC1005-0402 1022.28,-50.89 r90 bottom
C20 "Cap" CC1608-0603 1873,-1249 r90 top
C21 "Cap" CC1005-0402 895.43,1186.1 r90 bottom locked
C22 "Cap" CC1005-0402 990.43,991.1 r0 bottom locked
C23 "Cap" CC1005-0402 1055.43,1076.1 r0 bottom locked
C24 "Cap" CC1005-0402 990.43,1041.1 r0 bottom locked
C25 "Cap" CC1005-0402 990.43,1146.1 r90 bottom locked
C26 "Cap" CC1005-0402 930.43,1136.1 r90 bottom locked
C27 "Cap" CC1005-0402 955.43,636.1 r0 top
C28 "Cap" CC1005-0402 985.43,931.1 r180 bottom locked
C29 "Cap" CC1005-0402 955.43,696.1 r0 top
C30 "Cap" CC1005-0402 1240.43,806.1 r90 bottom locked
C31 "Cap" CC1005-0402 530.43,686.1 r270 top
C32 "Cap" CC1005-0402 670.43,771.1 r0 bottom locked
C33 "Cap" CC1005-0402 765.43,771.1 r0 bottom locked
C34 "Cap" CC1005-0402 620.43,656.1 r180 top
C35 "Cap" CC1005-0402 720.43,1301.1 r90 bottom locked
C36 "Cap" CC1005-0402 865.43,536.1 r90 top
C37 "Cap" CC1005-0402 620.43,1376.1 r180 top locked
C38 "Cap" CC1005-0402 650.43,566.1 r270 top
C39 "Cap" CC1005-0402 1310.43,806.1 r270 bottom
C40 "Cap" CC1005-0402 706.69,1440.24 r90 top locked
C41 "Cap" CC1005-0402 936.69,1440.24 r90 top locked
C42 "Cap" CC1005-0402 1916.69,965.24 r180 bottom
C43 "Cap" CC1005-0402 660.43,1781.1 r90 top locked
C44 "Cap" CC1005-0402 2020,1800 r90 bottom
C45 "Cap" CC1005-0402 2005.65,1626.64 r90 bottom locked
C46 "Cap" CC1005-0402 1411.69,1730.24 r90 bottom locked
C47 "Cap" CC1005-0402 2005.65,1456.64 r270 top locked
C48 "Cap" CC1005-0402 1511.69,1880.24 r0 top locked
C49 "Cap" CC1005-0402 1411.69,1805.24 r90 top locked
C50 "Cap" CC1005-0402 2005.65,1456.64 r90 bottom locked
C51 "Cap" CC1005-0402 1411.69,1445.24 r90 top locked
C52 "Cap" CC1005-0402 1416.69,1515.24 r90 bottom locked
C53 "Cap" CC1005-0402 1975,1905 r0 bottom
C54 "Cap" CC1005-0402 1411.69,1545.24 r270 top locked
C55 "Cap" CC1005-0402 2005.65,1626.64 r270 top locked
C56 "Cap" CC1005-0402 730.43,426.1 r0 top
C57 "Cap" CC1005-0402 490.43,456.1 r90 top
C58 "Cap" CC1005-0402 1515.43,956.1 r0 top
C59 "Cap" CC1005-0402 1265.43,1611.1 r270 top locked
C60 "Cap" CC1005-0402 595.43,1596.1 r90 top locked
C61_DP0 "ceramic Cap" CC1005-0402 -2081.88,15065.53 r180 top (schematic designator C61)
C61_DP1 "ceramic Cap" CC1005-0402 -2595.66,14746.64 r180 top (schematic designator C61)
C61_DP2 "ceramic Cap" CC1005-0402 -3127.15,15065.53 r180 top (schematic designator C61)
C61_DP3 "ceramic Cap" CC1005-0402 -3660.62,15065.53 r180 top (schematic designator C61)
C61_DP4 "ceramic Cap" CC1005-0402 -4192.11,15065.53 r180 top (schematic designator C61)
C61_DP5 "ceramic Cap" CC1005-0402 -4723.61,15065.53 r180 top (schematic designator C61)
C61_DP6 "ceramic Cap" CC1005-0402 -5257.07,15065.53 r180 top (schematic designator C61)
C61_DP7 "ceramic Cap" CC1005-0402 -5638.5,5374.8 r90 top (schematic designator C61)
C62_DP0 "ceramic Cap" CC1005-0402 -2081.88,14126.56 r180 top (schematic designator C62)
C62_DP1 "ceramic Cap" CC1005-0402 -2595.66,13847.03 r180 top (schematic designator C62)
C62_DP2 "ceramic Cap" CC1005-0402 -3127.15,14126.56 r180 top (schematic designator C62)
C62_DP3 "ceramic Cap" CC1005-0402 -3660.62,14126.56 r180 top (schematic designator C62)
C62_DP4 "ceramic Cap" CC1005-0402 -4192.11,14126.56 r180 top (schematic designator C62)
C62_DP5 "ceramic Cap" CC1005-0402 -4723.61,14126.56 r180 top (schematic designator C62)
C62_DP6 "ceramic Cap" CC1005-0402 -5257.07,14126.56 r180 top (schematic designator C62)
C62_DP7 "ceramic Cap" CC1005-0402 -5613.5,5594.8 r180 top (schematic designator C62)
C63_DP0 "ceramic Cap" CC1005-0402 -2081.88,13185.61 r180 top (schematic designator C63)
C63_DP1 "ceramic Cap" CC1005-0402 -2595.66,12945.46 r180 top (schematic designator C63)
C63_DP2 "ceramic Cap" CC1005-0402 -3127.15,13185.61 r180 top (schematic designator C63)
C63_DP3 "ceramic Cap" CC1005-0402 -3660.62,13185.61 r180 top (schematic designator C63)
C63_DP4 "ceramic Cap" CC1005-0402 -4192.11,13185.61 r180 top (schematic designator C63)
C63_DP5 "ceramic Cap" CC1005-0402 -4723.61,13185.61 r180 top (schematic designator C63)
C63_DP6 "ceramic Cap" CC1005-0402 -5257.07,13185.61 r180 top (schematic designator C63)
C63_DP7 "ceramic Cap" CC1005-0402 -5993.5,5229.8 r270 top (schematic designator C63)
C64_DP0 "ceramic Cap" CC1005-0402 -2081.88,13656.09 r180 top (schematic designator C64)
C64_DP1 "ceramic Cap" CC1005-0402 -2595.66,13396.24 r180 top (schematic designator C64)
C64_DP2 "ceramic Cap" CC1005-0402 -3127.15,13656.09 r180 top (schematic designator C64)
C64_DP3 "ceramic Cap" CC1005-0402 -3660.62,13656.09 r180 top (schematic designator C64)
C64_DP4 "ceramic Cap" CC1005-0402 -4192.11,13656.09 r180 top (schematic designator C64)
C64_DP5 "ceramic Cap" CC1005-0402 -4723.61,13656.09 r180 top (schematic designator C64)
C64_DP6 "ceramic Cap" CC1005-0402 -5257.07,13656.09 r180 top (schematic designator C64)
C64_DP7 "ceramic Cap" CC1005-0402 -5913.5,5144.8 r180 top (schematic designator C64)
C65 "Cap" CC1005-0402 11669.23,-1121.24 r90 top
C66 "Cap" CC1005-0402 11609.23,-1121.24 r90 top
C67 "Cap" CC1005-0402 10509.23,-1081.24 r90 top
C68 "Cap" CC1005-0402 26150.15,6783.66 r90 top
C69 "Cap" CC1005-0402 26380.46,6783.66 r90 top
C70 "Cap" CC1005-0402 25711.17,6783.66 r90 top
C71 "Cap" CC1005-0402 25969.04,6797.44 r0 top
C72 "Cap" CC1005-0402 25250.54,6783.66 r90 top
C73 "Cap" CC1005-0402 25480.86,6783.66 r90 top
C74 "Cap" CC1005-0402 24620.62,6783.66 r90 top
C75 "Cap" CC1005-0402 24850.94,6783.66 r90 top
C76 "Cap" CC1005-0402 24390.31,6783.66 r90 top
C77 "Cap" CC1005-0402 24159.99,6783.66 r90 top
C78 "Cap" CC1005-0402 23760.39,6783.66 r90 top
C79_DP0 "Cap Pol1" TC3528-1411 -2028.73,11772.23 r180 top (schematic designator C79)
C79_DP1 "Cap Pol1" TC3528-1411 -2540.54,11591.13 r180 top (schematic designator C79)
C79_DP2 "Cap Pol1" TC3528-1411 -3072.04,11772.23 r180 top (schematic designator C79)
C79_DP3 "Cap Pol1" TC3528-1411 -3605.5,11772.23 r180 top (schematic designator C79)
C79_DP4 "Cap Pol1" TC3528-1411 -4136.99,11772.23 r180 top (schematic designator C79)
C79_DP5 "Cap Pol1" TC3528-1411 -4670.46,11772.23 r180 top (schematic designator C79)
C79_DP6 "Cap Pol1" TC3528-1411 -5201.95,11772.23 r180 top (schematic designator C79)
C79_DP7 "Cap Pol1" TC3528-1411 -5873.5,5684.8 r180 top (schematic designator C79)
C80 "Cap" CC1005-0402 23530.07,6783.66 r90 top
C81 "Cap" CC1005-0402 23350.94,6797.44 r0 top
C82 "Cap" CC1005-0402 22860.78,6783.66 r90 top
C83 "Cap" CC1005-0402 23091.1,6783.66 r90 top
C84 "Cap" CC1005-0402 22230.86,6783.66 r90 top
C85 "Cap" CC1005-0402 22461.18,6783.66 r90 top
C86 "Cap" CC1005-0402 21770.23,6783.66 r90 top
C87 "Cap" CC1005-0402 22000.55,6783.66 r90 top
C88 "Cap" CC1005-0402 21311.57,6783.66 r90 top
C89 "Cap" CC1005-0402 21539.92,6783.66 r90 top
C90 "Cap" CC1005-0402 20870.63,6783.66 r90 top
C91 "Cap" CC1005-0402 21130.47,6797.44 r0 top
C92 "Cap" CC1005-0402 20410,6783.66 r90 top
C93 "Cap" CC1005-0402 20640.31,6783.66 r90 top
C94 "Cap" CC1005-0402 20181.65,6783.66 r90 top
C95 "Cap" CC1005-0402 19951.34,6783.66 r90 top
C96 "Cap" CC1005-0402 19490.71,6783.66 r90 top
C97 "Cap" CC1005-0402 19721.03,6783.66 r90 top
C98 "Cap" CC1005-0402 19260.4,6783.66 r90 top
C99 "Cap" CC1005-0402 19030.08,6783.66 r90 top
C100 "Cap" CC1005-0402 18490.71,6783.66 r90 top
C101 "Cap" CC1005-0402 18770.24,6783.66 r90 top
C102 "Cap" CC1005-0402 17931.66,6783.66 r90 top
C103 "Cap" CC1005-0402 18211.19,6783.66 r90 top
C104 "Cap" CC1005-0402 17370.64,6783.66 r90 top
C105 "Cap" CC1005-0402 17652.13,6783.66 r90 top
C106 "Cap" CC1005-0402 16811.58,6783.66 r90 top
C107 "Cap" CC1005-0402 17091.11,6783.66 r90 top
C108_DP0 "ceramic Cap" CC1005-0402 -2081.88,16516.32 r180 top (schematic designator C108)
C108_DP1 "ceramic Cap" CC1005-0402 -2595.66,16136.4 r180 top (schematic designator C108)
C108_DP2 "ceramic Cap" CC1005-0402 -3127.15,16516.32 r180 top (schematic designator C108)
C108_DP3 "ceramic Cap" CC1005-0402 -3660.62,16516.32 r180 top (schematic designator C108)
C108_DP4 "ceramic Cap" CC1005-0402 -4192.11,16516.32 r180 top (schematic designator C108)
C108_DP5 "ceramic Cap" CC1005-0402 -4723.61,16516.32 r180 top (schematic designator C108)
C108_DP6 "ceramic Cap" CC1005-0402 -5257.07,16516.32 r180 top (schematic designator C108)
C108_DP7 "ceramic Cap" CC1005-0402 -5638.5,5259.8 r270 top (schematic designator C108)
C109_DP0 "ceramic Cap" CC1005-0402 -2081.88,15994.66 r180 top (schematic designator C109)
C109_DP1 "ceramic Cap" CC1005-0402 -2595.66,15636.4 r180 top (schematic designator C109)
C109_DP2 "ceramic Cap" CC1005-0402 -3127.15,15994.66 r180 top (schematic designator C109)
C109_DP3 "ceramic Cap" CC1005-0402 -3660.62,15994.66 r180 top (schematic designator C109)
C109_DP4 "ceramic Cap" CC1005-0402 -4192.11,15994.66 r180 top (schematic designator C109)
C109_DP5 "ceramic Cap" CC1005-0402 -4723.61,15994.66 r180 top (schematic designator C109)
C109_DP6 "ceramic Cap" CC1005-0402 -5257.07,15994.66 r180 top (schematic designator C109)
C109_DP7 "ceramic Cap" CC1005-0402 -5654.5,5143.2 r180 top (schematic designator C109)
C110 "Cap" CC1005-0402 16541.9,6783.66 r90 top
C111 "Cap" CC1005-0402 15752.53,6783.66 r90 top
C112 "Cap" CC1005-0402 16002.53,6783.66 r90 top
C113 "Cap" CC1005-0402 16272.21,6783.66 r90 top
C114 "Cap" CC1005-0402 14941.51,6783.66 r90 top
C115 "Cap" CC1005-0402 15211.19,6783.66 r90 top
C116 "Cap" CC1005-0402 15480.88,6783.66 r90 top
C117 "Cap" CC1005-0402 14112.77,6783.66 r90 top
C118_DP0 "ceramic Cap" CC1005-0402 -2081.88,10197.43 r180 top (schematic designator C118)
C118_DP1 "ceramic Cap" CC1005-0402 -2595.66,10077.35 r180 top (schematic designator C118)
C118_DP2 "ceramic Cap" CC1005-0402 -3127.15,10197.43 r180 top (schematic designator C118)
C118_DP3 "ceramic Cap" CC1005-0402 -3660.62,10197.43 r180 top (schematic designator C118)
C118_DP4 "ceramic Cap" CC1005-0402 -4192.11,10197.43 r180 top (schematic designator C118)
C118_DP5 "ceramic Cap" CC1005-0402 -4723.61,10197.43 r180 top (schematic designator C118)
C118_DP6 "ceramic Cap" CC1005-0402 -5257.07,10197.43 r180 top (schematic designator C118)
C118_DP7 "ceramic Cap" CC1005-0402 -5993.5,5344.8 r270 top (schematic designator C118)
C119_DP0 "ceramic Cap" CC1005-0402 -2081.88,10707.27 r180 top (schematic designator C119)
C119_DP1 "ceramic Cap" CC1005-0402 -2595.66,10565.54 r180 top (schematic designator C119)
C119_DP2 "ceramic Cap" CC1005-0402 -3127.15,10707.27 r180 top (schematic designator C119)
C119_DP3 "ceramic Cap" CC1005-0402 -3660.62,10707.27 r180 top (schematic designator C119)
C119_DP4 "ceramic Cap" CC1005-0402 -4192.11,10707.27 r180 top (schematic designator C119)
C119_DP5 "ceramic Cap" CC1005-0402 -4723.61,10707.27 r180 top (schematic designator C119)
C119_DP6 "ceramic Cap" CC1005-0402 -5257.07,10707.27 r180 top (schematic designator C119)
C119_DP7 "ceramic Cap" CC1005-0402 -5643.5,5759.8 r180 top (schematic designator C119)
C120_DP0 "ceramic Cap" CC1005-0402 -2081.88,11217.11 r180 top (schematic designator C120)
C120_DP1 "ceramic Cap" CC1005-0402 -2595.66,11055.7 r180 top (schematic designator C120)
C120_DP2 "ceramic Cap" CC1005-0402 -3127.15,11217.11 r180 top (schematic designator C120)
C120_DP3 "ceramic Cap" CC1005-0402 -3660.62,11217.11 r180 top (schematic designator C120)
C120_DP4 "ceramic Cap" CC1005-0402 -4192.11,11217.11 r180 top (schematic designator C120)
C120_DP5 "ceramic Cap" CC1005-0402 -4723.61,11217.11 r180 top (schematic designator C120)
C120_DP6 "ceramic Cap" CC1005-0402 -5257.07,11217.11 r180 top (schematic designator C120)
C120_DP7 "ceramic Cap" CC1005-0402 -5638.5,5844.8 r180 top (schematic designator C120)
C121_DP0 "ceramic Cap" CC1005-0402 -2081.88,8646.25 r180 top (schematic designator C121)
C121_DP1 "ceramic Cap" CC1005-0402 -2595.66,8587.2 r180 top (schematic designator C121)
C121_DP2 "ceramic Cap" CC1005-0402 -3127.15,8646.25 r180 top (schematic designator C121)
C121_DP3 "ceramic Cap" CC1005-0402 -3660.62,8646.25 r180 top (schematic designator C121)
C121_DP4 "ceramic Cap" CC1005-0402 -4192.11,8646.25 r180 top (schematic designator C121)
C121_DP5 "ceramic Cap" CC1005-0402 -4723.61,8646.25 r180 top (schematic designator C121)
C121_DP6 "ceramic Cap" CC1005-0402 -5257.07,8646.25 r180 top (schematic designator C121)
C121_DP7 "ceramic Cap" CC1005-0402 -5633.5,5669.8 r180 top (schematic designator C121)
C122_DP0 "ceramic Cap" CC1005-0402 -2081.88,9156.1 r180 top (schematic designator C122)
C122_DP1 "ceramic Cap" CC1005-0402 -2595.66,9077.36 r180 top (schematic designator C122)
C122_DP2 "ceramic Cap" CC1005-0402 -3127.15,9156.1 r180 top (schematic designator C122)
C122_DP3 "ceramic Cap" CC1005-0402 -3660.62,9156.1 r180 top (schematic designator C122)
C122_DP4 "ceramic Cap" CC1005-0402 -4192.11,9156.1 r180 top (schematic designator C122)
C122_DP5 "ceramic Cap" CC1005-0402 -4723.61,9156.1 r180 top (schematic designator C122)
C122_DP6 "ceramic Cap" CC1005-0402 -5257.07,9156.1 r180 top (schematic designator C122)
C122_DP7 "ceramic Cap" CC1005-0402 -5998.5,5459.8 r270 top (schematic designator C122)
C123_DP0 "ceramic Cap" CC1005-0402 -2081.88,9675.78 r180 top (schematic designator C123)
C123_DP1 "ceramic Cap" CC1005-0402 -2595.66,9577.35 r180 top (schematic designator C123)
C123_DP2 "ceramic Cap" CC1005-0402 -3127.15,9675.78 r180 top (schematic designator C123)
C123_DP3 "ceramic Cap" CC1005-0402 -3660.62,9675.78 r180 top (schematic designator C123)
C123_DP4 "ceramic Cap" CC1005-0402 -4192.11,9675.78 r180 top (schematic designator C123)
C123_DP5 "ceramic Cap" CC1005-0402 -4723.61,9675.78 r180 top (schematic designator C123)
C123_DP6 "ceramic Cap" CC1005-0402 -5257.07,9675.78 r180 top (schematic designator C123)
C123_DP7 "ceramic Cap" CC1005-0402 -5633.5,5474.8 r270 top (schematic designator C123)
C124_DP0 "ceramic Cap" CC1005-0402 -2081.88,7717.12 r180 top (schematic designator C124)
C124_DP1 "ceramic Cap" CC1005-0402 -2595.66,7697.44 r180 top (schematic designator C124)
C124_DP2 "ceramic Cap" CC1005-0402 -3127.15,7717.12 r180 top (schematic designator C124)
C124_DP3 "ceramic Cap" CC1005-0402 -3660.62,7717.12 r180 top (schematic designator C124)
C124_DP4 "ceramic Cap" CC1005-0402 -4192.11,7717.12 r180 top (schematic designator C124)
C124_DP5 "ceramic Cap" CC1005-0402 -4723.61,7717.12 r180 top (schematic designator C124)
C124_DP6 "ceramic Cap" CC1005-0402 -5257.07,7717.12 r180 top (schematic designator C124)
C124_DP7 "ceramic Cap" CC1005-0402 -5563.5,5479.8 r270 top (schematic designator C124)
C125_DP0 "ceramic Cap" CC1005-0402 -2081.88,7197.44 r180 top (schematic designator C125)
C125_DP1 "ceramic Cap" CC1005-0402 -2595.66,7197.44 r180 top (schematic designator C125)
C125_DP2 "ceramic Cap" CC1005-0402 -3127.15,7197.44 r180 top (schematic designator C125)
C125_DP3 "ceramic Cap" CC1005-0402 -3660.62,7197.44 r180 top (schematic designator C125)
C125_DP4 "ceramic Cap" CC1005-0402 -4192.11,7197.44 r180 top (schematic designator C125)
C125_DP5 "ceramic Cap" CC1005-0402 -4723.61,7197.44 r180 top (schematic designator C125)
C125_DP6 "ceramic Cap" CC1005-0402 -5257.07,7197.44 r180 top (schematic designator C125)
C125_DP7 "ceramic Cap" CC1005-0402 -5798.5,5074.8 r180 top (schematic designator C125)
C126 "Cap" CC1005-0402 14382.45,6783.66 r90 top
C127 "Cap" CC1005-0402 14661.98,6783.66 r90 top
C128 "Cap" CC1005-0402 13551.75,6783.66 r90 top
C129 "Cap" CC1005-0402 13831.27,6783.66 r90 top
C130 "Cap" CC1005-0402 13272.22,6783.66 r90 top
C131 "Cap" CC1005-0402 -2665.47,1080.28 r315 bottom
C132 "Cap" CC1005-0402 -2665.47,1155.28 r315 bottom
C133 "Cap" CC1005-0402 6554.69,608.23 r180 bottom
C134 "Cap" CC1005-0402 -2665.47,1315.28 r315 bottom
C135 "Cap" CC1005-0402 8568.98,1468.58 r270 bottom
C136 "Cap" CC1005-0402 -2665.47,1235.28 r315 bottom
C137 "Cap" CC1005-0402 8207.52,-1459.96 r315 bottom
C138 "Cap" CC1005-0402 11053.72,6783.66 r90 top
C139 "Cap" CC1005-0402 10553.72,6783.66 r90 top
C140 "Cap" CC1005-0402 10053.72,6783.66 r90 top
C141 "Cap" CC1005-0402 9793.88,6783.66 r90 top
C142 "Cap" CC1005-0402 9512.38,6783.66 r90 top
C143 "Cap" CC1005-0402 9232.86,6783.66 r90 top
C144 "Cap" CC1005-0402 8953.33,6783.66 r90 top
C145 "Cap" CC1005-0402 8673.8,6783.66 r90 top
C146 "Cap" CC1005-0402 8163.96,6783.66 r90 top
C147 "Cap Pol1" TC3528-1411 7967.11,6762.01 r0 top
C148 "ceramic Cap" CC1005-0402 11339.68,-252.69 r90 top
C149 "ceramic Cap" CC1005-0402 11621.18,-252.69 r90 top
C150 "ceramic Cap" CC1005-0402 11900.7,-252.69 r90 top
C151 "ceramic Cap" CC1005-0402 12180.23,-252.69 r90 top
C152 "Cap" CC1005-0402 7602.94,6783.66 r90 top
C153 "Cap" CC1005-0402 7323.41,6783.66 r90 top
C154 "Cap" CC1005-0402 7043.89,6783.66 r90 top
C155 "Cap Pol1" TC3528-1411 6847.03,6762.01 r0 top
C156 "Cap" CC1005-0402 6043.89,6783.66 r90 top
C157 "Cap" CC1005-0402 5764.36,6783.66 r90 top
C158 "Cap" CC1005-0402 5482.86,6783.66 r90 top
C159 "Cap Pol1" TC3528-1411 5286.01,6762.01 r0 top
C160 "Cap" CC1005-0402 4923.81,6783.66 r90 top
C161 "Cap" CC1005-0402 4663.97,6783.66 r90 top
C162 "Cap Pol1" TC3528-1411 951.69,1715.24 r90 top locked
C163 "Cap" CC1005-0402 4093.1,6783.66 r90 top
C164 "Cap" CC1005-0402 15031.1,2843.7 r90 top
C165 "Cap" CC1005-0402 14751.57,2843.7 r90 top
C166 "Cap" CC1608-0603 -623.65,1958.56 r0 top
C167 "Cap" CC1608-0603 -550,1886 r180 top
C168 "Cap" CC3216-1206 -951.38,3509.3 r90 top
C169 "Cap" CC3216-1206 -821.14,3509.3 r90 top
C170 "Cap" CC3216-1206 -2133.74,3266.66 r90 top
C171 "Cap" CC3216-1206 -493.83,2915.64 r0 top
C172 "Cap" CC1608-0603 -269.17,3081.25 r90 top
C175 "Cap" CC3216-1206 -8.27,1891.24 r270 top
C176 "Cap" CC3216-1206 -111.27,1891.24 r270 top
C177 "Cap" CC3216-1206 -44.74,1894.61 r270 bottom
C178 "Cap" CC3216-1206 2673.29,-583.37 r270 bottom
C179 "Cap" CC3216-1206 58,1893 r270 bottom
C180 "Cap" CC1608-0603 -949,1890 r0 bottom
C181 "Cap" CC1608-0603 -2441.46,2911.64 r90 top
C182 "Cap" CC1608-0603 -552,1814 r0 top
C183 "Cap" CC3216-1206 160.88,1686.91 r270 bottom
C184 "Cap" CC3216-1206 -10.67,1683.44 r270 top
C185 "Cap" CC3216-1206 -111.67,1683.44 r270 top
C186 "Cap" CC3216-1206 -44.82,1686.08 r270 bottom
C187 "Cap" CC3216-1206 57.18,1686.08 r270 bottom
C188 "Cap" CC1608-0603 -565.39,3081.25 r90 top
C189 "Cap" CC1608-0603 -948,1745 r0 bottom
C190 "Cap" CC1608-0603 -534,1741 r0 top
C191 "Cap" CC1608-0603 -1256.57,2911.64 r90 top
C192 "Cap" CC1608-0603 -1355.31,2911.64 r90 top
C193 "Cap" CC1608-0603 -703,1656 r180 top
C194 "Cap" CC1608-0603 -326,1601 r0 bottom
C195 "Cap" CC1608-0603 -954,1641 r270 top
C196 "Cap" CC1608-0603 4394.46,5834.85 r90 top
C197 "Cap" CC1608-0603 4311.36,5782.49 r90 top
C199 "Cap" CC1608-0603 -1872,2639 r90 top
C201 "Cap" CC3216-1206 3887.9,6137.51 r90 top
C202 "Cap" CC3216-1206 3757.66,6137.51 r90 top
C203 "Cap" CC3216-1206 4148.37,6137.51 r90 top
C204 "Cap" CC3216-1206 4018.14,6137.51 r90 top
C205 "Cap" CC3216-1206 4288.84,6380.15 r90 top
C206 "Cap" CC1608-0603 3323.96,5782.49 r90 top
C207 "Cap" CC3216-1206 4158.61,6380.15 r90 top
C208 "Cap" CC3216-1206 5857.46,6752.85 r90 top
C209 "Cap" CC3216-1206 4809.79,6380.15 r90 top
C210 "Cap" CC3216-1206 4679.55,6380.15 r90 top
C211 "Cap" CC3216-1206 5093.54,5786.49 r0 top
C212 "Cap" CC1608-0603 3422.7,5782.49 r90 top
C213 "Cap Pol1" OSCON_E7 228,1788 r270 top
C214 "Cap Pol1" OSCON_F12 -1211,1381 r180 top
C215 "Cap Pol1" OSCON_F12 -1211,1816 r180 top
C216 "Cap" CC1608-0603 3521.44,5782.49 r90 top
C217 "Cap" CC1608-0603 3620.18,5782.49 r90 top
C218 "Cap" CC1608-0603 3718.92,5782.49 r90 top
C219 "Cap" CC1608-0603 3126.48,5782.49 r90 top
C220 "Cap" CC1608-0603 4217.46,5400.85 r90 top
C221 "Cap" CC1005-0402 -1574.99,7406.73 r180 top
C222 "Cap" CC1005-0402 -1574.99,7678.38 r180 top
C223 "Cap" CC1005-0402 -1574.99,7967.75 r180 top
C224 "Cap" CC1005-0402 -1574.99,8257.12 r180 top
C225 "Cap" CC1005-0402 -1574.99,8546.49 r180 top
C226 "Cap Pol1" TC3528-1411 -1519.87,7152.79 r180 top
C227 "Cap" CC1005-0402 -1574.99,5955.94 r180 top
C228 "Cap" CC1005-0402 -1574.99,5666.57 r180 top
C229 "Cap" CC1005-0402 4703.34,5736.41 r90 top
C230 "Cap" CC1005-0402 4413.97,5736.41 r90 top
C231 "Cap" CC1005-0402 4142.31,5736.41 r90 top
C232 "Cap" CC1005-0402 15070.46,1796.45 r90 top
C233 "Cap" CC1005-0402 14781.1,1796.45 r90 top
C234 "Cap" CC1005-0402 14491.73,1796.45 r90 top
C235 "Cap" CC1005-0402 14200.39,1796.45 r90 top
C236 "Cap" CC1005-0402 13911.02,1796.45 r90 top
C237 "Cap" CC1005-0402 13621.65,1796.45 r90 top
C238 "Cap" CC1005-0402 13330.31,1796.45 r90 top
C239 "Cap" CC1005-0402 13040.94,1796.45 r90 top
C240 "Cap" CC1005-0402 12751.57,1796.45 r90 top
C241 "Cap Pol1" TC3528-1411 1125,690 r180 top
C242 "Cap Pol1" TC3528-1411 1401.69,705.24 r0 top
C243 "Cap Pol1" TC3528-1411 4408.06,6728.54 r90 top
C244 "Cap Pol1" TC3528-1411 13395.92,2601.04 r90 top
C245 "Cap Pol1" TC3528-1411 13395.92,2341.04 r90 top
C246 "Cap Pol1" TC3528-1411 12955.92,2401.04 r90 top
C247 "Cap Pol1" TC3528-1411 13255.92,2341.04 r90 top
C249 "Cap Pol1" OSCON_E7 3306.95,7227.76 r90 top
C250 "ceramic Cap" CC1005-0402 2825,660 r90 top
C251 "ceramic Cap" CC1005-0402 2940,715 r90 top
C252 "Cap" CC1005-0402 1085.43,1006.1 r270 bottom locked
CN1 "PLHD20S" PLHTD20S-GC 295.75,81.73 r90 top
CN2 "UTCA_MCH_TONGUE1" UTCA_MCH_TONGUE1 -4850,705 r0 top
CN3 "RJ45 with magnetics" J0011D21BNL 1885.75,-253.27 r270 top
CN4 "JAE KX15-70p" JAE_KX15_70p -1358,97 r270 top
CN5 "JAE KX15-70p" JAE_KX15_70p -1014,107 r270 top
CN6 "JAE KX15-40p" JAE_KX15_40P 12157.52,1345.04 r180 top
CN7 "PLHD10S" PLHTD10S-GC -1745,-540 r90 top
CN8 "PLHD10S" PLHTD10S-GC 145.75,-103.27 r270 top
CN9 "PLHD10S" PLHTD10S-GC -1169.48,14014.98 r180 top
CN10 "Battery" con_1x2_1.27 75.75,986.73 r90 top
D1 "LED" CD1608-0603 1995,2056.75 r270 bottom
D2 "LED" CD1608-0603 1995,2055 r270 top
D3 "LED" CD1608-0603 1780,2055 r270 top
D4 "LED" CD1608-0603 1660,2055 r270 top
D5 "DuoLED" DUOLED_LNJ123 2232,622 r90 top
D6 "DuoLED" DUOLED_LNJ123 2232.22,784.35 r90 top
D7 "DuoLED" DUOLED_LNJ123 2232.22,947.68 r90 top
D8 "DuoLED" DUOLED_LNJ123 2232.22,1111.01 r90 top
D9 "DuoLED" DUOLED_LNJ123 2232.22,1274.35 r90 top
D10 "DuoLED" DUOLED_LNJ123 2232.22,1437.68 r90 top
D11 "DuoLED" DUOLED_LNJ123 2232.22,1601.01 r90 top
D12 "DuoLED" DUOLED_LNJ123 2232.22,1764.35 r90 top
D13 "D Schottky" SMB 4988.77,4417.52 r90 top
D14 "D Schottky" CD3216-1206 -431,1970 r0 bottom
D15 "LED_2v5" CD1608-0603 -69,2281 r270 top
D16 "LED_Vbulk" CD1608-0603 -1552,1228 r180 top
D17 "P6SMB15CA" DO-214AA/SMB -1579,1506 r90 top
D18 "D Schottky" CD3216-1206 4914.1,6137.51 r90 top
D19 "LED_3v3" CD1608-0603 4362.46,5256.85 r90 top
D20 "D Schottky" CD2012-0805 515.43,976.1 r0 top
D21 "D Schottky" CD2012-0805 516.69,1050.24 r0 top locked
F1 "F_POLYSWITCH" PTC_SMD_1812 -1588,1879 r270 top
IC1 "MC100EPT21" TSOP65P490-8AN 7018.4,4401 r90 top
IC2 "ICS8343" TQFP80P900X900-32AM 571,4336 r0 top
IC3 "CFPS-73" CFPS_73 491.22,-63.58 r0 top
IC4 "DM9161AEP" LQFP48l 1235.12,-26.06 r180 top
IC5 "AT91SAM9263-CU" TFBGA324 1258.84,1321.86 r270 top locked
IC6 "MT48LC16M16A2TG" TSOP54 1480.65,1831.64 r0 top locked
IC7 "MT48LC16M16A2TG" TSOP54 1940.65,1831.64 r180 bottom locked
IC8 "SN74AHC1G32" SOT23-5AL 595.43,446.1 r180 top
IC9 "SN74AHC1G32" SOT23-5AL 766.69,1775.24 r180 top locked
IC10 "MEM_AT45DB642" TSOP28-1 744.13,440.24 r0 bottom locked
IC11 "MEM_NAND256W3A2BN6E" TSOP48_12x20 541.69,1375.24 r0 bottom locked
IC12 "EP3C120" FBGA780-2 -2550.47,1150.28 r270 top locked
IC13 "LM20123" eTSSOP_16_MX 317,3165 r180 top
IC14 "TPS4005X" TI_PWP_16 -778.65,1810.56 r0 top
IC15 "TPS4005X" TI_PWP_16 3266.46,5395.85 r0 top
IC16 "ATmega128L-8AI" 64A_L -4225,1530 r270 bottom
IC17 "71V3556" TQFP100A101 -2062.11,422.63 r270 top
IC18 "24LC16" SOIC127P600-8AL -1460.82,6896.89 r90 top
IC19 "SN65LVDS1" SOT23-5AL 11137.52,-1464.96 r0 top
IC20 "SN65LVDS2" SOT23-5AL 7417.52,-1309.96 r0 top
IC23_DP0 "TLK1221" QFN40_powerpad -1859.44,12445.46 r180 top (schematic designator IC23)
IC23_DP1 "TLK1221" QFN40_powerpad -2371.25,12244.67 r180 top (schematic designator IC23)
IC23_DP2 "TLK1221" QFN40_powerpad -2902.75,12445.46 r180 top (schematic designator IC23)
IC23_DP3 "TLK1221" QFN40_powerpad -3436.21,12445.46 r180 top (schematic designator IC23)
IC23_DP4 "TLK1221" QFN40_powerpad -3967.7,12445.46 r180 top (schematic designator IC23)
IC23_DP5 "TLK1221" QFN40_powerpad -4501.17,12445.46 r180 top (schematic designator IC23)
IC23_DP6 "TLK1221" QFN40_powerpad 6872.52,-579.96 r180 top (schematic designator IC23)
IC23_DP7 "TLK1221" QFN40_powerpad -5682.24,5457.52 r180 top (schematic designator IC23)
IC39 "TMP100" SOT23A-6L 11097.56,-288.13 r0 top
IC40 "TMP100" SOT23A-6L 10818.03,-288.13 r0 top
IC41 "TMP100" SOT23A-6L 10575.06,-283.35 r0 top
IC42 "TMP100" SOT23A-6L 10276.69,-288.13 r0 top
L1 "3.3uH/8A" IHLP2525 -333,1808 r270 top
L2 "3.3uH/8A" IHLP2525 6239.46,5575.85 r90 top
L3 "Inductor" INDC1005-0402 26624.55,6817.12 r0 top
L4 "Inductor" INDC1608-0603 1071.22,34.67 r270 bottom
L5_DP0 "Inductor" INDC2012-0805 -2066.13,8230.9 r180 top (schematic designator L5)
L5_DP1 "Inductor" INDC2012-0805 -2579.91,8191.53 r180 top (schematic designator L5)
L5_DP2 "Inductor" INDC2012-0805 -3111.41,8230.9 r180 top (schematic designator L5)
L5_DP3 "Inductor" INDC2012-0805 -3644.87,8230.9 r180 top (schematic designator L5)
L5_DP4 "Inductor" INDC2012-0805 -4176.36,8230.9 r180 top (schematic designator L5)
L5_DP5 "Inductor" INDC2012-0805 -4707.86,8230.9 r180 top (schematic designator L5)
L5_DP6 "Inductor" INDC2012-0805 -5241.32,8230.9 r180 top (schematic designator L5)
L5_DP7 "Inductor" INDC2012-0805 -5783.5,5144.8 r180 top (schematic designator L5)
L6 "Inductor" INDC1005-0402 24004.48,6817.12 r0 top
L7 "Inductor" INDC1005-0402 22705.27,6817.12 r0 top
L8 "0.68uH/10A" IHLP2525 -1791.35,3821.82 r270 top
L9 "Inductor" INDC1608-0603 645.43,721.1 r0 bottom
L10 "Inductor" INDC1005-0402 279,-1004 r90 top
Q1 "Q_SI7860" SOIC127P600-8AL -209,1853 r270 bottom
Q2 "Q_SI7860" SOIC127P600-8AL -426,1780 r90 bottom
Q3 "Q_SI7860" SOIC127P600-8AL 5116.46,5533.85 r180 bottom
Q4 "Q_SI7860" SOIC127P600-8AL 5451.46,5491.85 r180 bottom
R1 "Res2" CR1005-0402 6339.16,5474.61 r0 top
R2 "Res2" CR1005-0402 5457.27,5474.61 r0 top
R3 "Res2" CR1005-0402 5282.08,5474.61 r0 top
R4 "Res2" CR1005-0402 4884.44,5474.61 r0 top
R5 "Res2" CR1005-0402 4709.24,5474.61 r0 top
R6 "Res2" CR1005-0402 4534.05,5474.61 r0 top
R7 "Res2" CR1005-0402 4356.88,5474.61 r0 top
R8 "Res2" CR1005-0402 4181.69,5474.61 r0 top
R9 "Res2" CR1005-0402 15222.04,1534.65 r0 top
R10 "Res2" CR1005-0402 14974.01,1507.09 r90 top
R11 "Res2" CR1005-0402 14802.75,1534.65 r0 top
R12 "Res2" CR1608-0603 1316.22,136.42 r270 top
R13 "Res2" CR1608-0603 1386.22,136.42 r270 top
R14 "Plane_Connect" PLANE_CONNECT_POINT 141.66,-1484.21 r90 top
R15 "Res2" CR1608-0603 1310,-5 r90 top
R16 "Res2" CR1005-0402 5032.08,5447.05 r90 top
R17 "Res2" CR1608-0603 1386.22,-8.58 r90 top
R18 "Res2" CR1005-0402 10833.25,6767.91 r90 top
R19 "Res2" CR1005-0402 10333.25,6767.91 r90 top
R20 "Res2" CR1005-0402 8443.49,6767.91 r90 top
R21 "Res2" CR1005-0402 6352.94,6797.44 r0 top
R22 "Res2" CR1005-0402 6534.04,6767.91 r90 top
R23 "Res2" CR1005-0402 781.22,51.42 r180 top
R24 "Res2" CR1608-0603 1245.12,-151.06 r270 top
R25 "Res2" CR1005-0402 776.22,191.42 r180 top
R26 "Res2" CR1608-0603 1915.75,-108.27 r180 bottom
R27 "Res2" CR1608-0603 1935.75,36.73 r180 bottom
R28 "Res2" CR1005-0402 620.43,901.1 r0 bottom locked
R29 "Res2" CR1005-0402 -584.25,261.73 r90 top
R30 "Res2" CR1005-0402 -574.25,61.73 r90 top
R31 "Res2" CR1005-0402 865.43,666.1 r270 top
R32 "Res2" CR1005-0402 650.43,1276.1 r90 top locked
R33 "Res2" CR1005-0402 650.43,811.1 r270 top locked
R34 "Res2" CR1005-0402 620.43,716.1 r180 top
R35 "Res2" CR1005-0402 590.43,341.1 r180 top
R36 "Res2" CR1005-0402 761.69,1680.24 r180 top locked
R37 "Res2" CR1005-0402 700,340 r180 top
R38 "Res2" CR1005-0402 700,280 r180 top
R39_DP0 "Res2" CR1608-0603 -2056.29,15532.07 r180 top (schematic designator R39)
R39_DP1 "Res2" CR1608-0603 -2568.1,15191.52 r180 top (schematic designator R39)
R39_DP2 "Res2" CR1608-0603 -3101.56,15532.07 r180 top (schematic designator R39)
R39_DP3 "Res2" CR1608-0603 -3633.06,15532.07 r180 top (schematic designator R39)
R39_DP4 "Res2" CR1608-0603 -4164.55,15532.07 r180 top (schematic designator R39)
R39_DP5 "Res2" CR1608-0603 -4698.02,15532.07 r180 top (schematic designator R39)
R39_DP6 "Res2" CR1608-0603 -5229.51,15532.07 r180 top (schematic designator R39)
R39_DP7 "Res2" CR1608-0603 -5808.5,5809.8 r180 top (schematic designator R39)
R40_DP0 "Res2" CR1608-0603 -2056.29,14602.93 r180 top (schematic designator R40)
R40_DP1 "Res2" CR1608-0603 -2568.1,14301.75 r180 top (schematic designator R40)
R40_DP2 "Res2" CR1608-0603 -3101.56,14602.93 r180 top (schematic designator R40)
R40_DP3 "Res2" CR1608-0603 -3633.06,14602.93 r180 top (schematic designator R40)
R40_DP4 "Res2" CR1608-0603 -4164.55,14602.93 r180 top (schematic designator R40)
R40_DP5 "Res2" CR1608-0603 -4698.02,14602.93 r180 top (schematic designator R40)
R40_DP6 "Res2" CR1608-0603 -5229.51,14602.93 r180 top (schematic designator R40)
R40_DP7 "Res2" CR1608-0603 -5943.5,5594.8 r180 top (schematic designator R40)
R41 "Res2" CR1005-0402 11260.41,4549.41 r0 top
R42 "Res2" CR1005-0402 9711.2,4521.85 r90 top
R43 "Res2" CR1005-0402 9480.89,4521.85 r90 top
R44 "Res2" CR1005-0402 9020.26,4521.85 r90 top
R45 "Res2" CR1005-0402 8791.91,4521.85 r90 top
R46 "Res2" CR1005-0402 8341.13,4521.85 r90 top
R47 "Res2" CR1005-0402 7900.18,4521.85 r90 top
R48 "Res2" CR1005-0402 6262.39,4521.85 r90 top
R49 "Res2" CR1005-0402 4498.61,4521.85 r90 top
R50 "Res2" CR1005-0402 4726.96,4521.85 r90 top
R51 "Res2" CR1005-0402 4087.2,4549.41 r0 top
R52 "Res2" CR1005-0402 4268.3,4521.85 r90 top
R53 "Res2" CR1005-0402 14432.67,581.89 r90 top
R54 "Res2" CR1005-0402 14662.99,581.89 r90 top
R55 "Res2" CR1005-0402 13972.04,581.89 r90 top
R56 "Res2" CR1005-0402 14202.36,581.89 r90 top
R57 "Res2" CR1005-0402 3646.25,1224.61 r90 top
R58 "Res2" CR1608-0603 -773.65,1957.56 r0 top
R59 "Res2" CR1608-0603 -917.65,1958.56 r0 top
R60 "Res2" CR1608-0603 -2540.2,3065.56 r90 top
R61_DP0 "Res2" CR1005-0402 -2068.1,12726.95 r180 top (schematic designator R61)
R61_DP1 "Res2" CR1005-0402 -2579.91,12506.48 r180 top (schematic designator R61)
R61_DP2 "Res2" CR1005-0402 -3113.37,12726.95 r180 top (schematic designator R61)
R61_DP3 "Res2" CR1005-0402 -3644.87,12726.95 r180 top (schematic designator R61)
R61_DP4 "Res2" CR1005-0402 -4176.36,12726.95 r180 top (schematic designator R61)
R61_DP5 "Res2" CR1005-0402 -4709.83,12726.95 r180 top (schematic designator R61)
R61_DP6 "Res2" CR1005-0402 -5241.32,12726.95 r180 top (schematic designator R61)
R61_DP7 "Res2" CR1005-0402 -5814.5,5523.2 r0 top (schematic designator R61)
R62 "Res2" CR1608-0603 -258.69,3282.47 r90 top
R63 "Res2" CR1608-0603 -159.95,3282.47 r90 top
R64 "Res2" CR1608-0603 -949,1962 r0 bottom
R65 "Res2" CR1608-0603 -950,1816 r180 bottom
R66 "Res2" CR1608-0603 -1750.28,3065.56 r90 top
R67 "Res2" CR1608-0603 -178,1602 r180 bottom
R68 "Res2" CR1608-0603 -152,2281 r90 top
R69 "Res2" CR1608-0603 -834,1656 r0 top
R70 "Res2" CR1608-0603 -178,1673 r180 bottom
R71 "Res2" CR1608-0603 -949,1675 r180 bottom
R72 "Res2" CR1608-0603 3323.96,5936.41 r90 top
R73 "Res2" CR1608-0603 4311.36,5936.41 r90 top
R74 "Res2" CR1608-0603 -1565,1309 r180 top
R75 "Res2" CR1608-0603 4508.84,5936.41 r90 top
R76 "Res2" CR1608-0603 3916.4,5936.41 r90 top
R77 "Res2" CR1608-0603 3817.66,5936.41 r90 top
R78 "Res2" CR1608-0603 4113.88,5936.41 r90 top
R79 "Plane_Connect" PLANE_CONNECT_POINT -2231.43,2796.1 r90 top
R80 "Res2" CR1608-0603 4015.14,5936.41 r90 top
R81 "Res2" CR1608-0603 3035.3,5648.32 r0 top
R82 "Plane_Connect" PLANE_CONNECT_POINT -2193.59,2796.1 r90 top
R83 "Res2" CR1608-0603 4212.62,5936.41 r90 top
R84 "Res2" CR1005-0402 -1561.21,13552.38 r180 top
R85 "Res2" CR1005-0402 -1561.21,13322.07 r180 top
R86 "Res2" CR1005-0402 -1561.21,12633.09 r180 top
R87 "Res2" CR1005-0402 -1561.21,12861.44 r180 top
R88 "Res2" CR1005-0402 -1561.21,13091.76 r180 top
R89 "Res2" CR1005-0402 -1561.21,12402.78 r180 top
R90 "Res2" CR1005-0402 -1561.21,11961.84 r180 top
R91 "Res2" CR1005-0402 -1588.77,12221.68 r90 top
R92 "Res2" CR1005-0402 -1561.21,10455.93 r180 top
R93 "Res2" CR1005-0402 -1561.21,9066.17 r180 top
R94 "Res2" CR1005-0402 -1561.21,8837.83 r180 top
R95 "Res2" CR1005-0402 10612.52,-1474.96 r90 top
RP1 "RES_PACK" YC124 857.28,278.43 r90 top
RP2 "RES_PACK" YC124 1107.28,218.43 r0 bottom
RP3 "RES_PACK" YC124 807.28,-81.57 r0 top
RP4 "RES_PACK" YC124 5699.69,2098.23 r0 top
RP5 "RES_PACK" YC124 1890,2045 r90 bottom
RP6 "RES_PACK" YC124 2130,880 r180 top
RP7 "RES_PACK" YC124 2130,970 r180 top
RP8 "RES_PACK" YC124 2145,1500 r180 top
RP9 "RES_PACK" YC124 -519.25,1081.73 r180 top
RP10 "RES_PACK" YC124 -1535.65,-1445.74 r90 top
RP11 "RES_PACK" YC124 -1495.65,-1615.74 r90 top
RP12 "RES_PACK" YC124 -1650.65,-1910.74 r90 top
RP13 "RES_PACK" YC124 -1475.65,-1230.74 r90 top
RP14 "RES_PACK" YC124 -1625.65,-1335.74 r90 top
RP15 "RES_PACK" YC124 -1882.25,-2034.74 r180 top
RP16 "RES_PACK" YC124 -1422.25,-1794.74 r180 top
RP17 "RES_PACK" YC124 -1422.25,-1654.74 r180 top
RP18 "RES_PACK" YC124 7542.52,-879.96 r180 top
RP19 "RES_PACK" YC124 -5632.46,1415.76 r0 top
RP20 "RES_PACK" YC124 -1586.8,14174.43 r180 top
RP21 "RES_PACK" YC124 -1586.8,10985.46 r180 top
RP22 "RES_PACK" YC124 -1586.8,10696.09 r180 top
RP23 "RES_PACK" YC124 -1586.8,10176.41 r180 top
RP24 "RES_PACK" YC124 -1586.8,9885.07 r180 top
RP25 "RES_PACK" YC124 -1586.8,9595.7 r180 top
RP26 "RES_PACK" YC124 -714.25,36.73 r180 bottom
RP28 "RES_PACK" YC124 2380.51,-602.15 r90 top
S1 "uTCA_HS" uTCA_HOTSWAP_SWITCH 1010,-475 r0 top
X1 "18.432 MHz" XTALL_ABM3 805.43,521.1 r90 top
X2 "32.768 kHz" XTALL_CC7V_T1A 826.69,1435.24 r180 top locked
X3 "8 MHz" ABRACON_ABMM -1305.31,6265 r180 top